# EAGLE board schematic (EAGLE 8.7.1), part 1 of 2
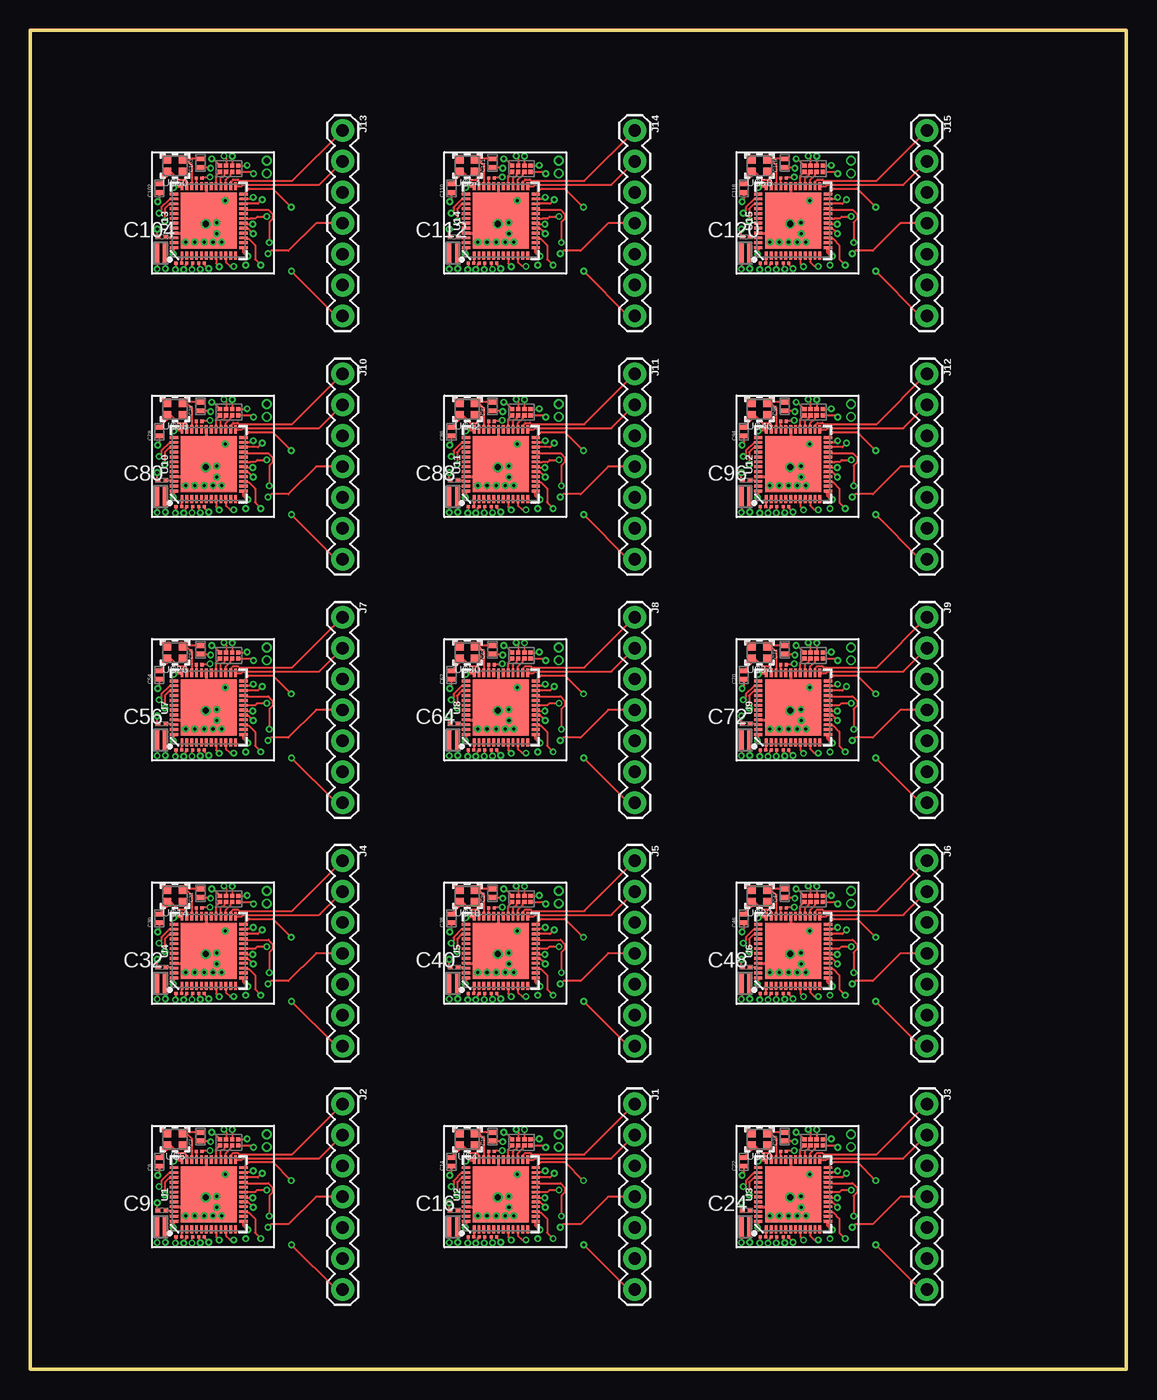
[diagram p0: board, top side]
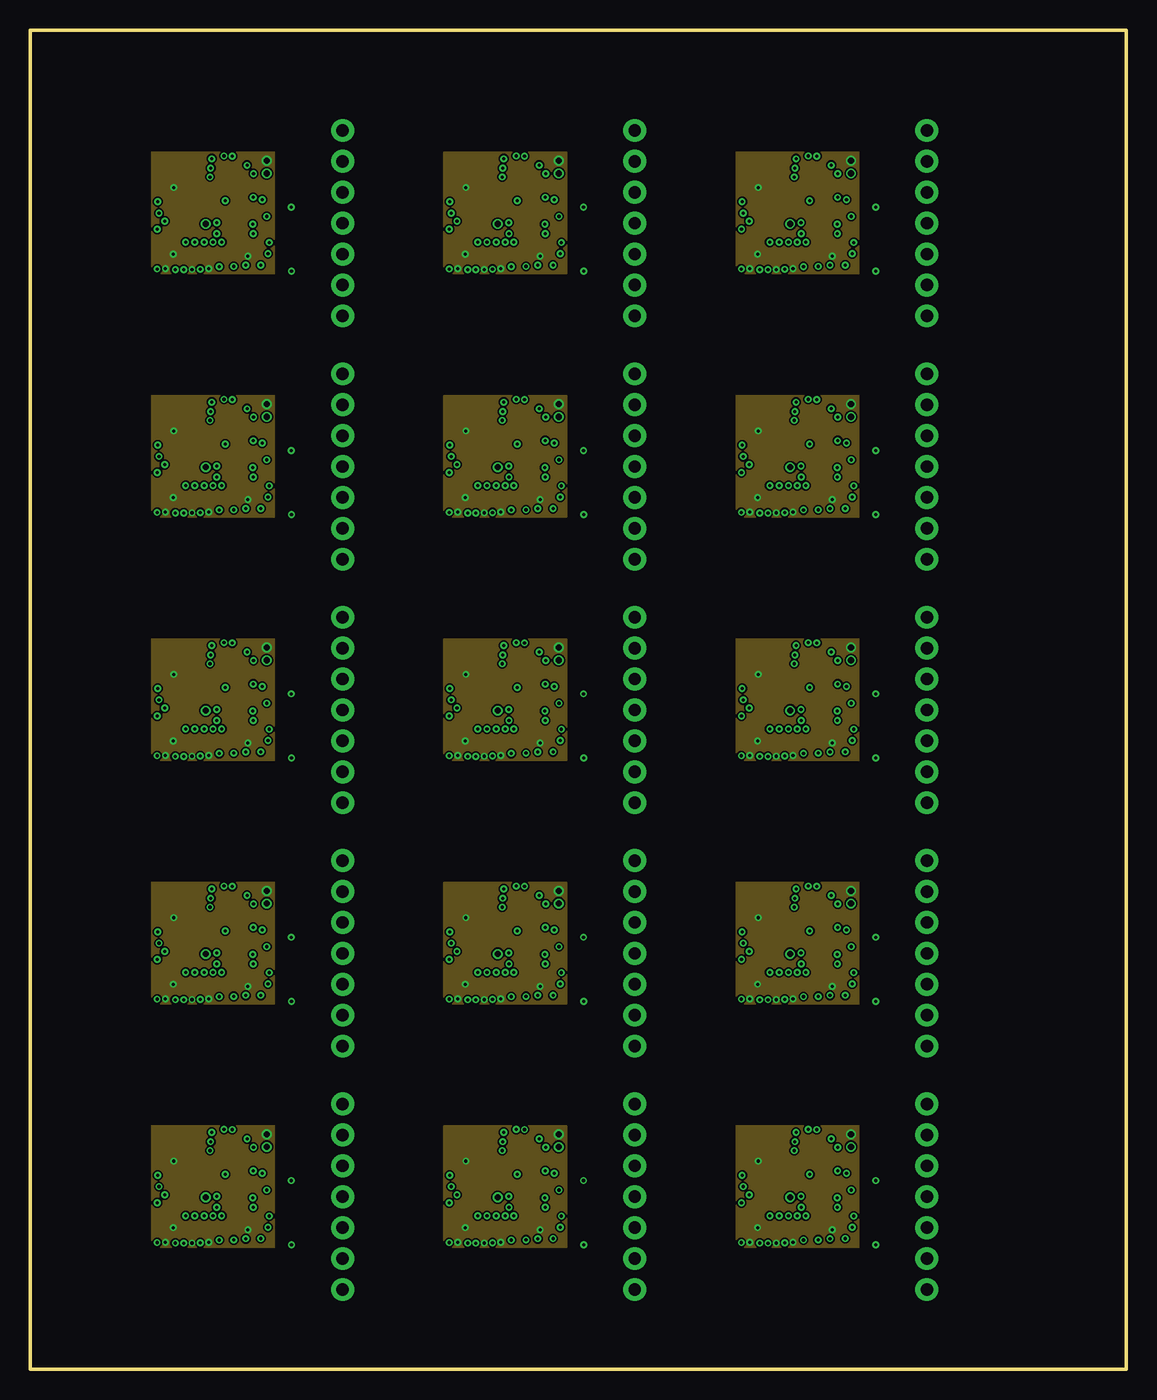
[diagram p1: board, inner layer Route8]
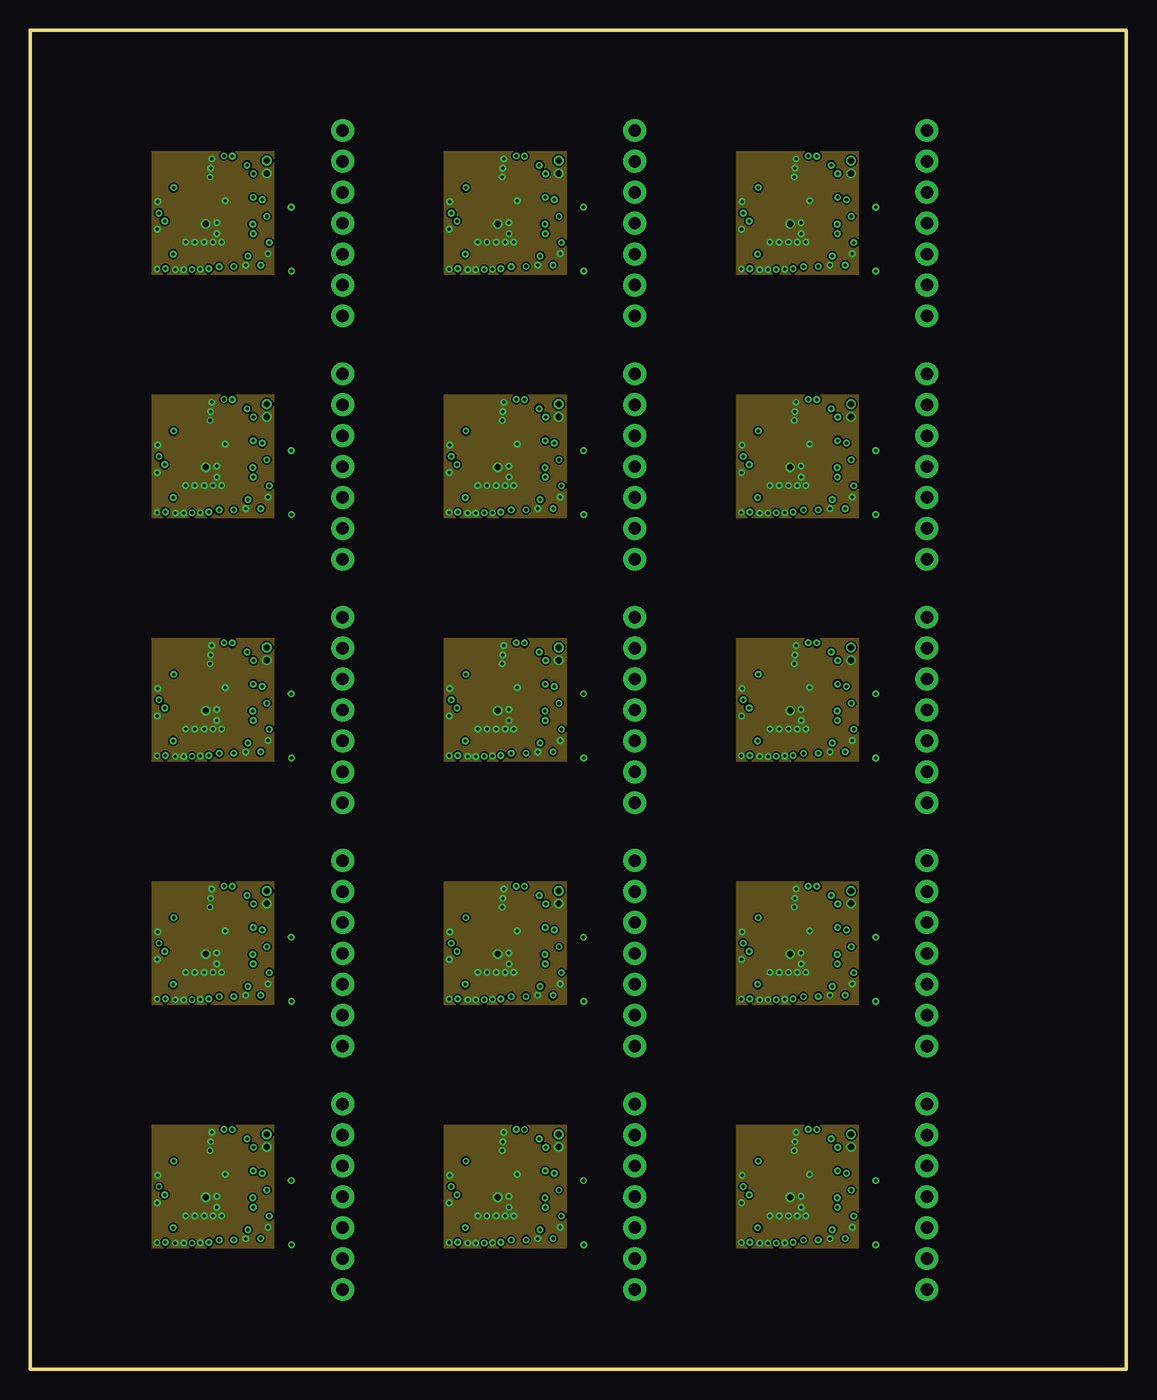
[diagram p2: board, inner layer Route10]
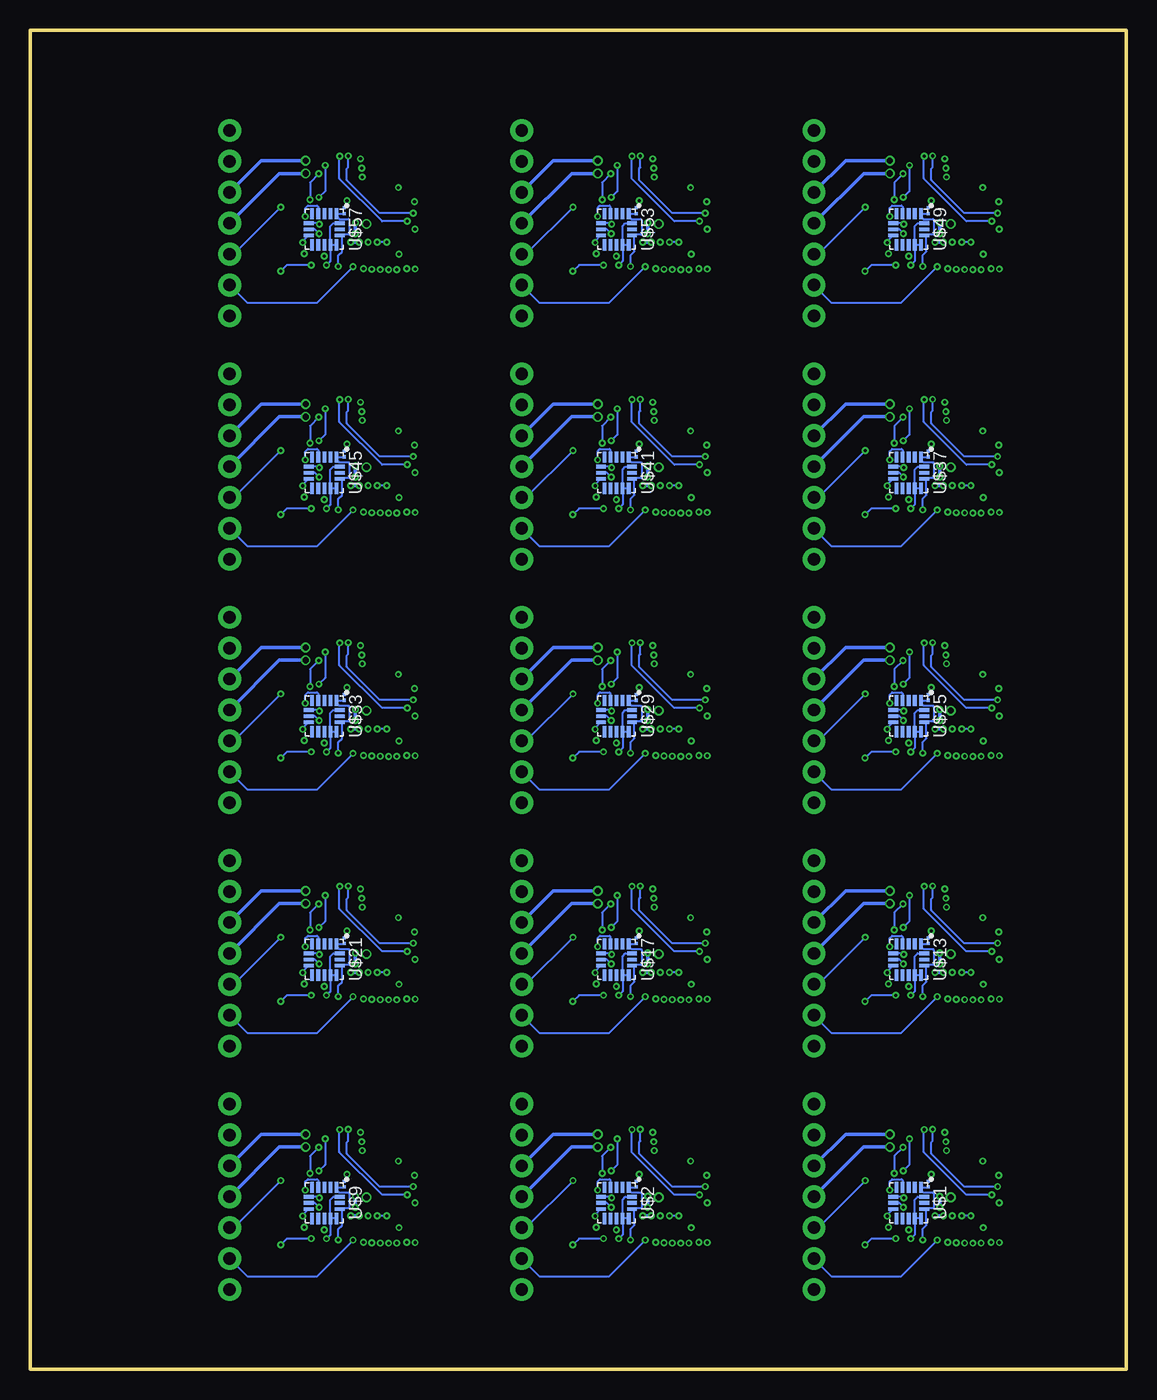
[diagram p3: board, bottom side, seen from below]

Size 90 x 110 mm. Coordinates in mm from the lower left corner, seen from the top.
Outline: 0,110 0,0 90,0 90,110 0,110
Copper layers (1*8*10*16): Top 0.035mm / dielectric 0.42mm / Route8 0.035mm / dielectric 0.62mm / Route10 0.035mm / dielectric 0.42mm / Bottom 0.035mm
Design rules "default *": minimum track width 6mil, minimum drill 10mil, track to track 5mil, track to pad 5mil, pad to pad 5mil, via to via 5mil, smd to smd 2mil, copper to edge 40mil, drill to drill 6mil, minimum pad ring 10mil, minimum via ring 6mil, stop-mask expansion 4mil, vias tented up to drill 0mil, thermal gap 10mil

## Footprints (pad centres in the part's own frame; a part is rotated, then mirrored left to right if it is on the bottom)
CAP_0402-L = smd 0.25 x 0.25: 1 -0.229,0; 2 0.229,0
CAPC1005X55N = smd 0.4 x 0.6: 1 -0.4,0; 2 0.3,0
4P7UFCAPACITOR = smd 0.35 x 1.6: 1 -0.4,0.1; 2 0.25,0.1
1X07 = drill 1.016 pad 1.88: 1 0,0; 2 2.54,0; 3 5.08,0; 4 7.62,0; 5 10.16,0; 6 12.7,0; 7 15.24,0
QFN48-6X6MM = smd 0.68 x 0.23: 1 -2.86,2.2; 2 -2.86,1.8; 3 -2.86,1.4; 4 -2.86,1; 5 -2.86,0.6; 6 -2.86,0.2; 7 -2.86,-0.2; 8 -2.86,-0.6; 9 -2.86,-1; 10 -2.86,-1.4; 11 -2.86,-1.8; 12 -2.86,-2.2; 25 2.86,-2.2; 26 2.86,-1.8; 27 2.86,-1.4; 28 2.86,-1; 29 2.86,-0.6; 30 2.86,-0.2; 31 2.86,0.2; 32 2.86,0.6; 33 2.86,1; 34 2.86,1.4; 35 2.86,1.8; 36 2.86,2.2 | smd 0.23 x 0.68: 13 -2.2,-2.86; 14 -1.8,-2.86; 15 -1.4,-2.86; 16 -1,-2.86; 17 -0.6,-2.86; 18 -0.2,-2.86; 19 0.2,-2.86; 20 0.6,-2.86; 21 1,-2.86; 22 1.4,-2.86; 23 1.8,-2.86; 24 2.2,-2.86; 37 2.2,2.86; 38 1.8,2.86; 39 1.4,2.86; 40 1,2.86; 41 0.6,2.86; 42 0.2,2.86; 43 -0.2,2.86; 44 -0.6,2.86; 45 -1,2.86; 46 -1.4,2.86; 47 -1.8,2.86; 48 -2.2,2.86 | smd 4.6 x 4.6: EP 0,0
TFLGA-16/3.3MMX3.1MM = smd 0.3 x 0.8: CS 0.5,-1.275; GND@3 -0.5,1.275; MISO 0,-1.275; MOSI -0.5,-1.275; NC@2 0,1.275; VS 0.5,1.275 | smd 0.925 x 0.3: GND@1 1.288,0.5; GND@2 1.288,1; INT1 1.288,0; INT2 1.288,-1; NC@1 -1.288,0.5; RESERVED@1 -1.288,0; RESERVED@2 -1.288,-1; RESERVED@3 1.288,-0.5; SCLK -1.288,-0.5; VDD/IO -1.288,1
AT25SF161-UUD-T = smd 0.35 x 0.35: 1 1.2,0.9; 2 1.2,0.4; 3 1.2,-0.1; 4 1.2,-0.6; 5 0.7,0.9; 6 0.7,0.4; 7 0.7,-0.1; 8 0.7,-0.6
32MHZCRYSTAL = smd 0.75 x 0.7: 1 0.485,0.47; 2 1.835,0.47; 3 1.835,1.47; 4 0.485,1.47
1UFCAPACITOR = smd 0.35 x 0.4: P$3 0.18,0.15; P$4 0.8,0.15

## Placement (x,y rotation side)
C1  C0402X5R0G104M020BCCAP_0402-L  [CAP_0402-L]  16.24,15.19 270 bottom
C2  C0402X5R0G104M020BCCAP_0402-L  [CAP_0402-L]  12.19,10.88 180 top
C3  C0402X5R0G104M020BCCAP_0402-L  [CAP_0402-L]  14.07,10.87 0 top
C4  C0402X5R0G104M020BCCAP_0402-L  [CAP_0402-L]  13.09,10.87 0 top
C5  C0402C0G1C101J020BCCAP_0402-L  [CAP_0402-L]  13.86,17.88 0 top
C6  GRM1555C1H6R0CA01D  [CAPC1005X55N]  10.59,17.08 90 top
C7  GRM1555C1H6R0CA01D  [CAPC1005X55N]  13.96,19.14 90 top
C8  C0402X5R0G104M020BCCAP_0402-L  [CAP_0402-L]  40.24,15.19 270 bottom
C9  4P7UFCAPACITOR4P7UFCAPACITOR  [4P7UFCAPACITOR]  10.81,11.59 0 top
C10  C0402X5R0G104M020BCCAP_0402-L  [CAP_0402-L]  36.19,10.88 180 top
C11  C0402X5R0G104M020BCCAP_0402-L  [CAP_0402-L]  38.07,10.87 0 top
C12  C0402X5R0G104M020BCCAP_0402-L  [CAP_0402-L]  37.09,10.87 0 top
C13  C0402C0G1C101J020BCCAP_0402-L  [CAP_0402-L]  37.86,17.88 0 top
C14  GRM1555C1H6R0CA01D  [CAPC1005X55N]  34.59,17.08 90 top
C15  GRM1555C1H6R0CA01D  [CAPC1005X55N]  37.96,19.14 90 top
C16  4P7UFCAPACITOR4P7UFCAPACITOR  [4P7UFCAPACITOR]  34.81,11.59 0 top
C17  C0402X5R0G104M020BCCAP_0402-L  [CAP_0402-L]  64.24,15.19 270 bottom
C18  C0402X5R0G104M020BCCAP_0402-L  [CAP_0402-L]  60.19,10.88 180 top
C19  C0402X5R0G104M020BCCAP_0402-L  [CAP_0402-L]  62.07,10.87 0 top
C20  C0402X5R0G104M020BCCAP_0402-L  [CAP_0402-L]  61.09,10.87 0 top
C21  C0402C0G1C101J020BCCAP_0402-L  [CAP_0402-L]  61.86,17.88 0 top
C22  GRM1555C1H6R0CA01D  [CAPC1005X55N]  58.59,17.08 90 top
C23  GRM1555C1H6R0CA01D  [CAPC1005X55N]  61.96,19.14 90 top
C24  4P7UFCAPACITOR4P7UFCAPACITOR  [4P7UFCAPACITOR]  58.81,11.59 0 top
C25  C0402X5R0G104M020BCCAP_0402-L  [CAP_0402-L]  16.24,35.19 270 bottom
C26  C0402X5R0G104M020BCCAP_0402-L  [CAP_0402-L]  12.19,30.88 180 top
C27  C0402X5R0G104M020BCCAP_0402-L  [CAP_0402-L]  14.07,30.87 0 top
C28  C0402X5R0G104M020BCCAP_0402-L  [CAP_0402-L]  13.09,30.87 0 top
C29  C0402C0G1C101J020BCCAP_0402-L  [CAP_0402-L]  13.86,37.88 0 top
C30  GRM1555C1H6R0CA01D  [CAPC1005X55N]  10.59,37.08 90 top
C31  GRM1555C1H6R0CA01D  [CAPC1005X55N]  13.96,39.14 90 top
C32  4P7UFCAPACITOR4P7UFCAPACITOR  [4P7UFCAPACITOR]  10.81,31.59 0 top
C33  C0402X5R0G104M020BCCAP_0402-L  [CAP_0402-L]  40.24,35.19 270 bottom
C34  C0402X5R0G104M020BCCAP_0402-L  [CAP_0402-L]  36.19,30.88 180 top
C35  C0402X5R0G104M020BCCAP_0402-L  [CAP_0402-L]  38.07,30.87 0 top
C36  C0402X5R0G104M020BCCAP_0402-L  [CAP_0402-L]  37.09,30.87 0 top
C37  C0402C0G1C101J020BCCAP_0402-L  [CAP_0402-L]  37.86,37.88 0 top
C38  GRM1555C1H6R0CA01D  [CAPC1005X55N]  34.59,37.08 90 top
C39  GRM1555C1H6R0CA01D  [CAPC1005X55N]  37.96,39.14 90 top
C40  4P7UFCAPACITOR4P7UFCAPACITOR  [4P7UFCAPACITOR]  34.81,31.59 0 top
C41  C0402X5R0G104M020BCCAP_0402-L  [CAP_0402-L]  64.24,35.19 270 bottom
C42  C0402X5R0G104M020BCCAP_0402-L  [CAP_0402-L]  60.19,30.88 180 top
C43  C0402X5R0G104M020BCCAP_0402-L  [CAP_0402-L]  62.07,30.87 0 top
C44  C0402X5R0G104M020BCCAP_0402-L  [CAP_0402-L]  61.09,30.87 0 top
C45  C0402C0G1C101J020BCCAP_0402-L  [CAP_0402-L]  61.86,37.88 0 top
C46  GRM1555C1H6R0CA01D  [CAPC1005X55N]  58.59,37.08 90 top
C47  GRM1555C1H6R0CA01D  [CAPC1005X55N]  61.96,39.14 90 top
C48  4P7UFCAPACITOR4P7UFCAPACITOR  [4P7UFCAPACITOR]  58.81,31.59 0 top
C49  C0402X5R0G104M020BCCAP_0402-L  [CAP_0402-L]  16.24,55.19 270 bottom
C50  C0402X5R0G104M020BCCAP_0402-L  [CAP_0402-L]  12.19,50.88 180 top
C51  C0402X5R0G104M020BCCAP_0402-L  [CAP_0402-L]  14.07,50.87 0 top
C52  C0402X5R0G104M020BCCAP_0402-L  [CAP_0402-L]  13.09,50.87 0 top
C53  C0402C0G1C101J020BCCAP_0402-L  [CAP_0402-L]  13.86,57.88 0 top
C54  GRM1555C1H6R0CA01D  [CAPC1005X55N]  10.59,57.08 90 top
C55  GRM1555C1H6R0CA01D  [CAPC1005X55N]  13.96,59.14 90 top
C56  4P7UFCAPACITOR4P7UFCAPACITOR  [4P7UFCAPACITOR]  10.81,51.59 0 top
C57  C0402X5R0G104M020BCCAP_0402-L  [CAP_0402-L]  40.24,55.19 270 bottom
C58  C0402X5R0G104M020BCCAP_0402-L  [CAP_0402-L]  36.19,50.88 180 top
C59  C0402X5R0G104M020BCCAP_0402-L  [CAP_0402-L]  38.07,50.87 0 top
C60  C0402X5R0G104M020BCCAP_0402-L  [CAP_0402-L]  37.09,50.87 0 top
C61  C0402C0G1C101J020BCCAP_0402-L  [CAP_0402-L]  37.86,57.88 0 top
C62  GRM1555C1H6R0CA01D  [CAPC1005X55N]  34.59,57.08 90 top
C63  GRM1555C1H6R0CA01D  [CAPC1005X55N]  37.96,59.14 90 top
C64  4P7UFCAPACITOR4P7UFCAPACITOR  [4P7UFCAPACITOR]  34.81,51.59 0 top
C65  C0402X5R0G104M020BCCAP_0402-L  [CAP_0402-L]  64.24,55.19 270 bottom
C66  C0402X5R0G104M020BCCAP_0402-L  [CAP_0402-L]  60.19,50.88 180 top
C67  C0402X5R0G104M020BCCAP_0402-L  [CAP_0402-L]  62.07,50.87 0 top
C68  C0402X5R0G104M020BCCAP_0402-L  [CAP_0402-L]  61.09,50.87 0 top
C69  C0402C0G1C101J020BCCAP_0402-L  [CAP_0402-L]  61.86,57.88 0 top
C70  GRM1555C1H6R0CA01D  [CAPC1005X55N]  58.59,57.08 90 top
C71  GRM1555C1H6R0CA01D  [CAPC1005X55N]  61.96,59.14 90 top
C72  4P7UFCAPACITOR4P7UFCAPACITOR  [4P7UFCAPACITOR]  58.81,51.59 0 top
C73  C0402X5R0G104M020BCCAP_0402-L  [CAP_0402-L]  16.24,75.19 270 bottom
C74  C0402X5R0G104M020BCCAP_0402-L  [CAP_0402-L]  12.19,70.88 180 top
C75  C0402X5R0G104M020BCCAP_0402-L  [CAP_0402-L]  14.07,70.87 0 top
C76  C0402X5R0G104M020BCCAP_0402-L  [CAP_0402-L]  13.09,70.87 0 top
C77  C0402C0G1C101J020BCCAP_0402-L  [CAP_0402-L]  13.86,77.88 0 top
C78  GRM1555C1H6R0CA01D  [CAPC1005X55N]  10.59,77.08 90 top
C79  GRM1555C1H6R0CA01D  [CAPC1005X55N]  13.96,79.14 90 top
C80  4P7UFCAPACITOR4P7UFCAPACITOR  [4P7UFCAPACITOR]  10.81,71.59 0 top
C81  C0402X5R0G104M020BCCAP_0402-L  [CAP_0402-L]  40.24,75.19 270 bottom
C82  C0402X5R0G104M020BCCAP_0402-L  [CAP_0402-L]  36.19,70.88 180 top
C83  C0402X5R0G104M020BCCAP_0402-L  [CAP_0402-L]  38.07,70.87 0 top
C84  C0402X5R0G104M020BCCAP_0402-L  [CAP_0402-L]  37.09,70.87 0 top
C85  C0402C0G1C101J020BCCAP_0402-L  [CAP_0402-L]  37.86,77.88 0 top
C86  GRM1555C1H6R0CA01D  [CAPC1005X55N]  34.59,77.08 90 top
C87  GRM1555C1H6R0CA01D  [CAPC1005X55N]  37.96,79.14 90 top
C88  4P7UFCAPACITOR4P7UFCAPACITOR  [4P7UFCAPACITOR]  34.81,71.59 0 top
C89  C0402X5R0G104M020BCCAP_0402-L  [CAP_0402-L]  64.24,75.19 270 bottom
C90  C0402X5R0G104M020BCCAP_0402-L  [CAP_0402-L]  60.19,70.88 180 top
C91  C0402X5R0G104M020BCCAP_0402-L  [CAP_0402-L]  62.07,70.87 0 top
C92  C0402X5R0G104M020BCCAP_0402-L  [CAP_0402-L]  61.09,70.87 0 top
C93  C0402C0G1C101J020BCCAP_0402-L  [CAP_0402-L]  61.86,77.88 0 top
C94  GRM1555C1H6R0CA01D  [CAPC1005X55N]  58.59,77.08 90 top
C95  GRM1555C1H6R0CA01D  [CAPC1005X55N]  61.96,79.14 90 top
C96  4P7UFCAPACITOR4P7UFCAPACITOR  [4P7UFCAPACITOR]  58.81,71.59 0 top
C97  C0402X5R0G104M020BCCAP_0402-L  [CAP_0402-L]  16.24,95.19 270 bottom
C98  C0402X5R0G104M020BCCAP_0402-L  [CAP_0402-L]  12.19,90.88 180 top
C99  C0402X5R0G104M020BCCAP_0402-L  [CAP_0402-L]  14.07,90.87 0 top
C100  C0402X5R0G104M020BCCAP_0402-L  [CAP_0402-L]  13.09,90.87 0 top
C101  C0402C0G1C101J020BCCAP_0402-L  [CAP_0402-L]  13.86,97.88 0 top
C102  GRM1555C1H6R0CA01D  [CAPC1005X55N]  10.59,97.08 90 top
C103  GRM1555C1H6R0CA01D  [CAPC1005X55N]  13.96,99.14 90 top
C104  4P7UFCAPACITOR4P7UFCAPACITOR  [4P7UFCAPACITOR]  10.81,91.59 0 top
C105  C0402X5R0G104M020BCCAP_0402-L  [CAP_0402-L]  40.24,95.19 270 bottom
C106  C0402X5R0G104M020BCCAP_0402-L  [CAP_0402-L]  36.19,90.88 180 top
C107  C0402X5R0G104M020BCCAP_0402-L  [CAP_0402-L]  38.07,90.87 0 top
C108  C0402X5R0G104M020BCCAP_0402-L  [CAP_0402-L]  37.09,90.87 0 top
C109  C0402C0G1C101J020BCCAP_0402-L  [CAP_0402-L]  37.86,97.88 0 top
C110  GRM1555C1H6R0CA01D  [CAPC1005X55N]  34.59,97.08 90 top
C111  GRM1555C1H6R0CA01D  [CAPC1005X55N]  37.96,99.14 90 top
C112  4P7UFCAPACITOR4P7UFCAPACITOR  [4P7UFCAPACITOR]  34.81,91.59 0 top
C113  C0402X5R0G104M020BCCAP_0402-L  [CAP_0402-L]  64.24,95.19 270 bottom
C114  C0402X5R0G104M020BCCAP_0402-L  [CAP_0402-L]  60.19,90.88 180 top
C115  C0402X5R0G104M020BCCAP_0402-L  [CAP_0402-L]  62.07,90.87 0 top
C116  C0402X5R0G104M020BCCAP_0402-L  [CAP_0402-L]  61.09,90.87 0 top
C117  C0402C0G1C101J020BCCAP_0402-L  [CAP_0402-L]  61.86,97.88 0 top
C118  GRM1555C1H6R0CA01D  [CAPC1005X55N]  58.59,97.08 90 top
C119  GRM1555C1H6R0CA01D  [CAPC1005X55N]  61.96,99.14 90 top
C120  4P7UFCAPACITOR4P7UFCAPACITOR  [4P7UFCAPACITOR]  58.81,91.59 0 top
J1  header  [1X07]  49.64,21.78 270 top
J2  header  [1X07]  25.64,21.78 270 top
J3  header  [1X07]  73.64,21.78 270 top
J4  header  [1X07]  25.64,41.78 270 top
J5  header  [1X07]  49.64,41.78 270 top
J6  header  [1X07]  73.64,41.78 270 top
J7  header  [1X07]  25.64,61.78 270 top
J8  header  [1X07]  49.64,61.78 270 top
J9  header  [1X07]  73.64,61.78 270 top
J10  header  [1X07]  25.64,81.78 270 top
J11  header  [1X07]  49.64,81.78 270 top
J12  header  [1X07]  73.64,81.78 270 top
J13  header  [1X07]  25.64,101.78 270 top
J14  header  [1X07]  49.64,101.78 270 top
J15  header  [1X07]  73.64,101.78 270 top
U1  NRF52832  [QFN48-6X6MM]  14.65,14.35 90 top
U2  NRF52832  [QFN48-6X6MM]  38.65,14.35 90 top
U3  NRF52832  [QFN48-6X6MM]  62.65,14.35 90 top
U4  NRF52832  [QFN48-6X6MM]  14.65,34.35 90 top
U5  NRF52832  [QFN48-6X6MM]  38.65,34.35 90 top
U6  NRF52832  [QFN48-6X6MM]  62.65,34.35 90 top
U7  NRF52832  [QFN48-6X6MM]  14.65,54.35 90 top
U8  NRF52832  [QFN48-6X6MM]  38.65,54.35 90 top
U9  NRF52832  [QFN48-6X6MM]  62.65,54.35 90 top
U10  NRF52832  [QFN48-6X6MM]  14.65,74.35 90 top
U11  NRF52832  [QFN48-6X6MM]  38.65,74.35 90 top
U12  NRF52832  [QFN48-6X6MM]  62.65,74.35 90 top
U13  NRF52832  [QFN48-6X6MM]  14.65,94.35 90 top
U14  NRF52832  [QFN48-6X6MM]  38.65,94.35 90 top
U15  NRF52832  [QFN48-6X6MM]  62.65,94.35 90 top
U$1  ADXL362  [TFLGA-16/3.3MMX3.1MM]  17.86,13.66 270 bottom
U$2  ADXL362  [TFLGA-16/3.3MMX3.1MM]  41.86,13.66 270 bottom
U$3  AT25SF161-UUD-T  [AT25SF161-UUD-T]  16.17,19.58 270 top
U$4  32MHZCRYSTAL  [32MHZCRYSTAL]  37.05,19.85 180 top
U$5  1UFCAPACITOR  [1UFCAPACITOR]  34.31,12.88 0 top
U$6  32MHZCRYSTAL  [32MHZCRYSTAL]  13.05,19.85 180 top
U$7  1UFCAPACITOR  [1UFCAPACITOR]  10.31,12.88 0 top
U$8  AT25SF161-UUD-T  [AT25SF161-UUD-T]  40.17,19.58 270 top
U$9  ADXL362  [TFLGA-16/3.3MMX3.1MM]  65.86,13.66 270 bottom
U$10  32MHZCRYSTAL  [32MHZCRYSTAL]  61.05,19.85 180 top
U$11  1UFCAPACITOR  [1UFCAPACITOR]  58.31,12.88 0 top
U$12  AT25SF161-UUD-T  [AT25SF161-UUD-T]  64.17,19.58 270 top
U$13  ADXL362  [TFLGA-16/3.3MMX3.1MM]  17.86,33.66 270 bottom
U$14  32MHZCRYSTAL  [32MHZCRYSTAL]  13.05,39.85 180 top
U$15  1UFCAPACITOR  [1UFCAPACITOR]  10.31,32.88 0 top
U$16  AT25SF161-UUD-T  [AT25SF161-UUD-T]  16.17,39.58 270 top
U$17  ADXL362  [TFLGA-16/3.3MMX3.1MM]  41.86,33.66 270 bottom
U$18  32MHZCRYSTAL  [32MHZCRYSTAL]  37.05,39.85 180 top
U$19  1UFCAPACITOR  [1UFCAPACITOR]  34.31,32.88 0 top
U$20  AT25SF161-UUD-T  [AT25SF161-UUD-T]  40.17,39.58 270 top
U$21  ADXL362  [TFLGA-16/3.3MMX3.1MM]  65.86,33.66 270 bottom
U$22  32MHZCRYSTAL  [32MHZCRYSTAL]  61.05,39.85 180 top
U$23  1UFCAPACITOR  [1UFCAPACITOR]  58.31,32.88 0 top
U$24  AT25SF161-UUD-T  [AT25SF161-UUD-T]  64.17,39.58 270 top
U$25  ADXL362  [TFLGA-16/3.3MMX3.1MM]  17.86,53.66 270 bottom
U$26  32MHZCRYSTAL  [32MHZCRYSTAL]  13.05,59.85 180 top
U$27  1UFCAPACITOR  [1UFCAPACITOR]  10.31,52.88 0 top
U$28  AT25SF161-UUD-T  [AT25SF161-UUD-T]  16.17,59.58 270 top
U$29  ADXL362  [TFLGA-16/3.3MMX3.1MM]  41.86,53.66 270 bottom
U$30  32MHZCRYSTAL  [32MHZCRYSTAL]  37.05,59.85 180 top
U$31  1UFCAPACITOR  [1UFCAPACITOR]  34.31,52.88 0 top
U$32  AT25SF161-UUD-T  [AT25SF161-UUD-T]  40.17,59.58 270 top
U$33  ADXL362  [TFLGA-16/3.3MMX3.1MM]  65.86,53.66 270 bottom
U$34  32MHZCRYSTAL  [32MHZCRYSTAL]  61.05,59.85 180 top
U$35  1UFCAPACITOR  [1UFCAPACITOR]  58.31,52.88 0 top
U$36  AT25SF161-UUD-T  [AT25SF161-UUD-T]  64.17,59.58 270 top
U$37  ADXL362  [TFLGA-16/3.3MMX3.1MM]  17.86,73.66 270 bottom
U$38  32MHZCRYSTAL  [32MHZCRYSTAL]  13.05,79.85 180 top
U$39  1UFCAPACITOR  [1UFCAPACITOR]  10.31,72.88 0 top
U$40  AT25SF161-UUD-T  [AT25SF161-UUD-T]  16.17,79.58 270 top
U$41  ADXL362  [TFLGA-16/3.3MMX3.1MM]  41.86,73.66 270 bottom
U$42  32MHZCRYSTAL  [32MHZCRYSTAL]  37.05,79.85 180 top
U$43  1UFCAPACITOR  [1UFCAPACITOR]  34.31,72.88 0 top
U$44  AT25SF161-UUD-T  [AT25SF161-UUD-T]  40.17,79.58 270 top
U$45  ADXL362  [TFLGA-16/3.3MMX3.1MM]  65.86,73.66 270 bottom
U$46  32MHZCRYSTAL  [32MHZCRYSTAL]  61.05,79.85 180 top
U$47  1UFCAPACITOR  [1UFCAPACITOR]  58.31,72.88 0 top
U$48  AT25SF161-UUD-T  [AT25SF161-UUD-T]  64.17,79.58 270 top
U$49  ADXL362  [TFLGA-16/3.3MMX3.1MM]  17.86,93.66 270 bottom
U$50  32MHZCRYSTAL  [32MHZCRYSTAL]  13.05,99.85 180 top
U$51  1UFCAPACITOR  [1UFCAPACITOR]  10.31,92.88 0 top
U$52  AT25SF161-UUD-T  [AT25SF161-UUD-T]  16.17,99.58 270 top
U$53  ADXL362  [TFLGA-16/3.3MMX3.1MM]  41.86,93.66 270 bottom
U$54  32MHZCRYSTAL  [32MHZCRYSTAL]  37.05,99.85 180 top
U$55  1UFCAPACITOR  [1UFCAPACITOR]  34.31,92.88 0 top
U$56  AT25SF161-UUD-T  [AT25SF161-UUD-T]  40.17,99.58 270 top
U$57  ADXL362  [TFLGA-16/3.3MMX3.1MM]  65.86,93.66 270 bottom
U$58  32MHZCRYSTAL  [32MHZCRYSTAL]  61.05,99.85 180 top
U$59  1UFCAPACITOR  [1UFCAPACITOR]  58.31,92.88 0 top
U$60  AT25SF161-UUD-T  [AT25SF161-UUD-T]  64.17,99.58 270 top

## Library data of the parts
C1-C4 C8 C10-C12 C17-C20 C25-C28 C33-C36 C41-C44 C49-C52 C57-C60 C65-C68 C73-C76 C81-C84 C89-C92 C97-C100 C105-C108 C113-C116 = 0p1_uF_capacitor; MANUFACTURER_PART_NUMBER: C0402C0G1C101J020BC; VENDOR: TDK
C5 C13 C21 C29 C37 C45 C53 C61 C69 C77 C85 C93 C101 C109 C117 = 100_pF_capacitor; MANUFACTURER_PART_NUMBER: C0402C0G1C101J020BC; VENDOR: TDK
C6 C7 C14 C15 C22 C23 C30 C31 C38 C39 C46 C47 C54 C55 C62 C63 C70 C71 C78 C79 C86 C87 C94 C95 C102 C103 C110 C111 C118 C119 = 6pf_capacitor_new-bigger; DESCRIPTION: 0402 6 pF 50 V ±0.25 pF Tolerance C0G SMT Multilayer Ceramic Capacitor; DIGI-KEY_PART_NUMBER: 490-8222-1-ND; DIGI-KEY_PURCHASE_URL: https://www.digikey.com/product-detail/en/murata-electronics-north-america/GRM1555C1H6R0CA01D/490-8222-1-ND/4380516?WT.z_cid=ref_snapeda&utm_source=snapeda&utm_medium=aggregator&utm_campaign=buynow; MF: Murata; MP: GRM1555C1H6R0CA01D; PACKAGE: 0402 Murata
C9 C16 C24 C32 C40 C48 C56 C64 C72 C80 C88 C96 C104 C112 C120 = 4p7_uF_capacitor; MANUFACTURER_PART_NUMBER: C0816X5R0J475M050AC; VENDOR: TDK
J1-J15 = SparkFun-Connectors
U1-U15 = nrf52832-breakout-temp; PROD_ID: IC-13460
U$1 U$2 U$9 U$13 U$17 U$21 U$25 U$29 U$33 U$37 U$41 U$45 U$49 U$53 U$57 = ADXL362
U$3 U$8 U$12 U$16 U$20 U$24 U$28 U$32 U$36 U$40 U$44 U$48 U$52 U$56 U$60 = AT25SF161-UUD-T
U$4 U$6 U$10 U$14 U$18 U$22 U$26 U$30 U$34 U$38 U$42 U$46 U$50 U$54 U$58 = 32_mhz_crystal
U$5 U$7 U$11 U$15 U$19 U$23 U$27 U$31 U$35 U$39 U$43 U$47 U$51 U$55 U$59 = 1_uF_capacitor

## Nets
ADXL_POWER-QFAA: C1.2 U1.10 U$1.VDD/IO U$1.VS
ADXL_POWER-QFAA1: C8.2 U2.10 U$2.VDD/IO U$2.VS
ADXL_POWER-QFAA2: C17.2 U3.10 U$9.VDD/IO U$9.VS
ADXL_POWER-QFAA3: C25.2 U4.10 U$13.VDD/IO U$13.VS
ADXL_POWER-QFAA4: C33.2 U5.10 U$17.VDD/IO U$17.VS
ADXL_POWER-QFAA5: C41.2 U6.10 U$21.VDD/IO U$21.VS
ADXL_POWER-QFAA6: C49.2 U7.10 U$25.VDD/IO U$25.VS
ADXL_POWER-QFAA7: C57.2 U8.10 U$29.VDD/IO U$29.VS
ADXL_POWER-QFAA8: C65.2 U9.10 U$33.VDD/IO U$33.VS
ADXL_POWER-QFAA9: C73.2 U10.10 U$37.VDD/IO U$37.VS
ADXL_POWER-QFAA10: C81.2 U11.10 U$41.VDD/IO U$41.VS
ADXL_POWER-QFAA11: C89.2 U12.10 U$45.VDD/IO U$45.VS
ADXL_POWER-QFAA12: C97.2 U13.10 U$49.VDD/IO U$49.VS
ADXL_POWER-QFAA13: C105.2 U14.10 U$53.VDD/IO U$53.VS
ADXL_POWER-QFAA14: C113.2 U15.10 U$57.VDD/IO U$57.VS
ANT-QFAA: U1.30
ANT-QFAA1: U2.30
ANT-QFAA2: U3.30
ANT-QFAA3: U4.30
ANT-QFAA4: U5.30
ANT-QFAA5: U6.30
ANT-QFAA6: U7.30
ANT-QFAA7: U8.30
ANT-QFAA8: U9.30
ANT-QFAA9: U10.30
ANT-QFAA10: U11.30
ANT-QFAA11: U12.30
ANT-QFAA12: U13.30
ANT-QFAA13: U14.30
ANT-QFAA14: U15.30
CS-QFAA: U1.21 U$1.CS
CS-QFAA1: U2.21 U$2.CS
CS-QFAA2: U3.21 U$9.CS
CS-QFAA3: U4.21 U$13.CS
CS-QFAA4: U5.21 U$17.CS
CS-QFAA5: U6.21 U$21.CS
CS-QFAA6: U7.21 U$25.CS
CS-QFAA7: U8.21 U$29.CS
CS-QFAA8: U9.21 U$33.CS
CS-QFAA9: U10.21 U$37.CS
CS-QFAA10: U11.21 U$41.CS
CS-QFAA11: U12.21 U$45.CS
CS-QFAA12: U13.21 U$49.CS
CS-QFAA13: U14.21 U$53.CS
CS-QFAA14: U15.21 U$57.CS
CS_FLASH: U1.23 U$3.5
CS_FLASH1: U2.23 U$8.5
CS_FLASH2: U3.23 U$12.5
CS_FLASH3: U4.23 U$16.5
CS_FLASH4: U5.23 U$20.5
CS_FLASH5: U6.23 U$24.5
CS_FLASH6: U7.23 U$28.5
CS_FLASH7: U8.23 U$32.5
CS_FLASH8: U9.23 U$36.5
CS_FLASH9: U10.23 U$40.5
CS_FLASH10: U11.23 U$44.5
CS_FLASH11: U12.23 U$48.5
CS_FLASH12: U13.23 U$52.5
CS_FLASH13: U14.23 U$56.5
CS_FLASH14: U15.23 U$60.5
DEC1-QFAA: C2.1 U1.1
DEC1-QFAA1: C10.1 U2.1
DEC1-QFAA2: C18.1 U3.1
DEC1-QFAA3: C26.1 U4.1
DEC1-QFAA4: C34.1 U5.1
DEC1-QFAA5: C42.1 U6.1
DEC1-QFAA6: C50.1 U7.1
DEC1-QFAA7: C58.1 U8.1
DEC1-QFAA8: C66.1 U9.1
DEC1-QFAA9: C74.1 U10.1
DEC1-QFAA10: C82.1 U11.1
DEC1-QFAA11: C90.1 U12.1
DEC1-QFAA12: C98.1 U13.1
DEC1-QFAA13: C106.1 U14.1
DEC1-QFAA14: C114.1 U15.1
DEC3-QFAA: C5.1 U1.33
DEC3-QFAA1: C13.1 U2.33
DEC3-QFAA2: C21.1 U3.33
DEC3-QFAA3: C29.1 U4.33
DEC3-QFAA4: C37.1 U5.33
DEC3-QFAA5: C45.1 U6.33
DEC3-QFAA6: C53.1 U7.33
DEC3-QFAA7: C61.1 U8.33
DEC3-QFAA8: C69.1 U9.33
DEC3-QFAA9: C77.1 U10.33
DEC3-QFAA10: C85.1 U11.33
DEC3-QFAA11: C93.1 U12.33
DEC3-QFAA12: C101.1 U13.33
DEC3-QFAA13: C109.1 U14.33
DEC3-QFAA14: C117.1 U15.33
DEC4-QFAA: U1.46 U$7.P$4
DEC4-QFAA1: U2.46 U$5.P$4
DEC4-QFAA2: U3.46 U$11.P$4
DEC4-QFAA3: U4.46 U$15.P$4
DEC4-QFAA4: U5.46 U$19.P$4
DEC4-QFAA5: U6.46 U$23.P$4
DEC4-QFAA6: U7.46 U$27.P$4
DEC4-QFAA7: U8.46 U$31.P$4
DEC4-QFAA8: U9.46 U$35.P$4
DEC4-QFAA9: U10.46 U$39.P$4
DEC4-QFAA10: U11.46 U$43.P$4
DEC4-QFAA11: U12.46 U$47.P$4
DEC4-QFAA12: U13.46 U$51.P$4
DEC4-QFAA13: U14.46 U$55.P$4
DEC4-QFAA14: U15.46 U$59.P$4
FLASH_POWER: U1.22 U$3.1
FLASH_POWER1: U2.22 U$8.1
FLASH_POWER2: U3.22 U$12.1
FLASH_POWER3: U4.22 U$16.1
FLASH_POWER4: U5.22 U$20.1
FLASH_POWER5: U6.22 U$24.1
FLASH_POWER6: U7.22 U$28.1
FLASH_POWER7: U8.22 U$32.1
FLASH_POWER8: U9.22 U$36.1
FLASH_POWER9: U10.22 U$40.1
FLASH_POWER10: U11.22 U$44.1
FLASH_POWER11: U12.22 U$48.1
FLASH_POWER12: U13.22 U$52.1
FLASH_POWER13: U14.22 U$56.1
FLASH_POWER14: U15.22 U$60.1
GND: C1.1 C2.2 C3.1 C4.1 C5.2 C6.1 C7.1 C9.1 J2.4 U1.31 U1.45 U1.EP U$1.GND@1 U$1.GND@2 U$1.GND@3 U$3.8 U$7.P$3
GND1: C8.1 C10.2 C11.1 C12.1 C13.2 C14.1 C15.1 C16.1 J1.4 U2.31 U2.45 U2.EP U$2.GND@1 U$2.GND@2 U$2.GND@3 U$5.P$3 U$8.8
GND2: C17.1 C18.2 C19.1 C20.1 C21.2 C22.1 C23.1 C24.1 J3.4 U3.31 U3.45 U3.EP U$9.GND@1 U$9.GND@2 U$9.GND@3 U$11.P$3 U$12.8
GND3: C25.1 C26.2 C27.1 C28.1 C29.2 C30.1 C31.1 C32.1 J4.4 U4.31 U4.45 U4.EP U$13.GND@1 U$13.GND@2 U$13.GND@3 U$15.P$3 U$16.8
GND4: C33.1 C34.2 C35.1 C36.1 C37.2 C38.1 C39.1 C40.1 J5.4 U5.31 U5.45 U5.EP U$17.GND@1 U$17.GND@2 U$17.GND@3 U$19.P$3 U$20.8
GND5: C41.1 C42.2 C43.1 C44.1 C45.2 C46.1 C47.1 C48.1 J6.4 U6.31 U6.45 U6.EP U$21.GND@1 U$21.GND@2 U$21.GND@3 U$23.P$3 U$24.8
GND6: C49.1 C50.2 C51.1 C52.1 C53.2 C54.1 C55.1 C56.1 J7.4 U7.31 U7.45 U7.EP U$25.GND@1 U$25.GND@2 U$25.GND@3 U$27.P$3 U$28.8
GND7: C57.1 C58.2 C59.1 C60.1 C61.2 C62.1 C63.1 C64.1 J8.4 U8.31 U8.45 U8.EP U$29.GND@1 U$29.GND@2 U$29.GND@3 U$31.P$3 U$32.8
GND8: C65.1 C66.2 C67.1 C68.1 C69.2 C70.1 C71.1 C72.1 J9.4 U9.31 U9.45 U9.EP U$33.GND@1 U$33.GND@2 U$33.GND@3 U$35.P$3 U$36.8
GND9: C73.1 C74.2 C75.1 C76.1 C77.2 C78.1 C79.1 C80.1 J10.4 U10.31 U10.45 U10.EP U$37.GND@1 U$37.GND@2 U$37.GND@3 U$39.P$3 U$40.8
GND10: C81.1 C82.2 C83.1 C84.1 C85.2 C86.1 C87.1 C88.1 J11.4 U11.31 U11.45 U11.EP U$41.GND@1 U$41.GND@2 U$41.GND@3 U$43.P$3 U$44.8
GND11: C89.1 C90.2 C91.1 C92.1 C93.2 C94.1 C95.1 C96.1 J12.4 U12.31 U12.45 U12.EP U$45.GND@1 U$45.GND@2 U$45.GND@3 U$47.P$3 U$48.8
GND12: C97.1 C98.2 C99.1 C100.1 C101.2 C102.1 C103.1 C104.1 J13.4 U13.31 U13.45 U13.EP U$49.GND@1 U$49.GND@2 U$49.GND@3 U$51.P$3 U$52.8
GND13: C105.1 C106.2 C107.1 C108.1 C109.2 C110.1 C111.1 C112.1 J14.4 U14.31 U14.45 U14.EP U$53.GND@1 U$53.GND@2 U$53.GND@3 U$55.P$3 U$56.8
GND14: C113.1 C114.2 C115.1 C116.1 C117.2 C118.1 C119.1 C120.1 J15.4 U15.31 U15.45 U15.EP U$57.GND@1 U$57.GND@2 U$57.GND@3 U$59.P$3 U$60.8
HOLD_FLASH: U1.27 U$3.2
HOLD_FLASH1: U2.27 U$8.2
HOLD_FLASH2: U3.27 U$12.2
HOLD_FLASH3: U4.27 U$16.2
HOLD_FLASH4: U5.27 U$20.2
HOLD_FLASH5: U6.27 U$24.2
HOLD_FLASH6: U7.27 U$28.2
HOLD_FLASH7: U8.27 U$32.2
HOLD_FLASH8: U9.27 U$36.2
HOLD_FLASH9: U10.27 U$40.2
HOLD_FLASH10: U11.27 U$44.2
HOLD_FLASH11: U12.27 U$48.2
HOLD_FLASH12: U13.27 U$52.2
HOLD_FLASH13: U14.27 U$56.2
HOLD_FLASH14: U15.27 U$60.2
MISO-QFAA: U1.17 U$1.MISO
MISO-QFAA1: U2.17 U$2.MISO
MISO-QFAA2: U3.17 U$9.MISO
MISO-QFAA3: U4.17 U$13.MISO
MISO-QFAA4: U5.17 U$17.MISO
MISO-QFAA5: U6.17 U$21.MISO
MISO-QFAA6: U7.17 U$25.MISO
MISO-QFAA7: U8.17 U$29.MISO
MISO-QFAA8: U9.17 U$33.MISO
MISO-QFAA9: U10.17 U$37.MISO
MISO-QFAA10: U11.17 U$41.MISO
MISO-QFAA11: U12.17 U$45.MISO
MISO-QFAA12: U13.17 U$49.MISO
MISO-QFAA13: U14.17 U$53.MISO
MISO-QFAA14: U15.17 U$57.MISO
MOSI-QFAA: U1.18 U$1.MOSI
MOSI-QFAA1: U2.18 U$2.MOSI
MOSI-QFAA2: U3.18 U$9.MOSI
MOSI-QFAA3: U4.18 U$13.MOSI
MOSI-QFAA4: U5.18 U$17.MOSI
MOSI-QFAA5: U6.18 U$21.MOSI
MOSI-QFAA6: U7.18 U$25.MOSI
MOSI-QFAA7: U8.18 U$29.MOSI
MOSI-QFAA8: U9.18 U$33.MOSI
MOSI-QFAA9: U10.18 U$37.MOSI
MOSI-QFAA10: U11.18 U$41.MOSI
MOSI-QFAA11: U12.18 U$45.MOSI
MOSI-QFAA12: U13.18 U$49.MOSI
MOSI-QFAA13: U14.18 U$53.MOSI
MOSI-QFAA14: U15.18 U$57.MOSI
P0.06-QFAA: J2.6 U1.8
P0.06-QFAA1: J1.6 U2.8
P0.06-QFAA2: J3.6 U3.8
P0.06-QFAA3: J4.6 U4.8
P0.06-QFAA4: J5.6 U5.8
P0.06-QFAA5: J6.6 U6.8
P0.06-QFAA6: J7.6 U7.8
P0.06-QFAA7: J8.6 U8.8
P0.06-QFAA8: J9.6 U9.8
P0.06-QFAA9: J10.6 U10.8
P0.06-QFAA10: J11.6 U11.8
P0.06-QFAA11: J12.6 U12.8
P0.06-QFAA12: J13.6 U13.8
P0.06-QFAA13: J14.6 U14.8
P0.06-QFAA14: J15.6 U15.8
P0.12-QFAA: J2.7 U1.15
P0.12-QFAA1: J1.7 U2.15
P0.12-QFAA2: J3.7 U3.15
P0.12-QFAA3: J4.7 U4.15
P0.12-QFAA4: J5.7 U5.15
P0.12-QFAA5: J6.7 U6.15
P0.12-QFAA6: J7.7 U7.15
P0.12-QFAA7: J8.7 U8.15
P0.12-QFAA8: J9.7 U9.15
P0.12-QFAA9: J10.7 U10.15
P0.12-QFAA10: J11.7 U11.15
P0.12-QFAA11: J12.7 U12.15
P0.12-QFAA12: J13.7 U13.15
P0.12-QFAA13: J14.7 U14.15
P0.12-QFAA14: J15.7 U15.15
RESET-QFAA: J2.5 U1.24
RESET-QFAA1: J1.5 U2.24
RESET-QFAA2: J3.5 U3.24
RESET-QFAA3: J4.5 U4.24
RESET-QFAA4: J5.5 U5.24
RESET-QFAA5: J6.5 U6.24
RESET-QFAA6: J7.5 U7.24
RESET-QFAA7: J8.5 U8.24
RESET-QFAA8: J9.5 U9.24
RESET-QFAA9: J10.5 U10.24
RESET-QFAA10: J11.5 U11.24
RESET-QFAA11: J12.5 U12.24
RESET-QFAA12: J13.5 U13.24
RESET-QFAA13: J14.5 U14.24
RESET-QFAA14: J15.5 U15.24
SCK_FLASH: U1.28 U$3.3
SCK_FLASH1: U2.28 U$8.3
SCK_FLASH2: U3.28 U$12.3
SCK_FLASH3: U4.28 U$16.3
SCK_FLASH4: U5.28 U$20.3
SCK_FLASH5: U6.28 U$24.3
SCK_FLASH6: U7.28 U$28.3
SCK_FLASH7: U8.28 U$32.3
SCK_FLASH8: U9.28 U$36.3
SCK_FLASH9: U10.28 U$40.3
SCK_FLASH10: U11.28 U$44.3
SCK_FLASH11: U12.28 U$48.3
SCK_FLASH12: U13.28 U$52.3
SCK_FLASH13: U14.28 U$56.3
SCK_FLASH14: U15.28 U$60.3
SCLK-QFAA: U1.19 U$1.SCLK
SCLK-QFAA1: U2.19 U$2.SCLK
SCLK-QFAA2: U3.19 U$9.SCLK
SCLK-QFAA3: U4.19 U$13.SCLK
SCLK-QFAA4: U5.19 U$17.SCLK
SCLK-QFAA5: U6.19 U$21.SCLK
SCLK-QFAA6: U7.19 U$25.SCLK
SCLK-QFAA7: U8.19 U$29.SCLK
SCLK-QFAA8: U9.19 U$33.SCLK
SCLK-QFAA9: U10.19 U$37.SCLK
SCLK-QFAA10: U11.19 U$41.SCLK
SCLK-QFAA11: U12.19 U$45.SCLK
SCLK-QFAA12: U13.19 U$49.SCLK
SCLK-QFAA13: U14.19 U$53.SCLK
SCLK-QFAA14: U15.19 U$57.SCLK
SI_FLASH: U1.29 U$3.4
SI_FLASH1: U2.29 U$8.4
SI_FLASH2: U3.29 U$12.4
SI_FLASH3: U4.29 U$16.4
SI_FLASH4: U5.29 U$20.4
SI_FLASH5: U6.29 U$24.4
SI_FLASH6: U7.29 U$28.4
SI_FLASH7: U8.29 U$32.4
SI_FLASH8: U9.29 U$36.4
SI_FLASH9: U10.29 U$40.4
SI_FLASH10: U11.29 U$44.4
SI_FLASH11: U12.29 U$48.4
SI_FLASH12: U13.29 U$52.4
SI_FLASH13: U14.29 U$56.4
SI_FLASH14: U15.29 U$60.4
SO_FLASH: U1.39 U$3.6
SO_FLASH1: U2.39 U$8.6
SO_FLASH2: U3.39 U$12.6
SO_FLASH3: U4.39 U$16.6
SO_FLASH4: U5.39 U$20.6
SO_FLASH5: U6.39 U$24.6
SO_FLASH6: U7.39 U$28.6
SO_FLASH7: U8.39 U$32.6
SO_FLASH8: U9.39 U$36.6
SO_FLASH9: U10.39 U$40.6
SO_FLASH10: U11.39 U$44.6
SO_FLASH11: U12.39 U$48.6
SO_FLASH12: U13.39 U$52.6
SO_FLASH13: U14.39 U$56.6
SO_FLASH14: U15.39 U$60.6
SWDCLK-QFAA: J2.2 U1.25
SWDCLK-QFAA1: J1.2 U2.25
SWDCLK-QFAA2: J3.2 U3.25
SWDCLK-QFAA3: J4.2 U4.25
SWDCLK-QFAA4: J5.2 U5.25
SWDCLK-QFAA5: J6.2 U6.25
SWDCLK-QFAA6: J7.2 U7.25
SWDCLK-QFAA7: J8.2 U8.25
SWDCLK-QFAA8: J9.2 U9.25
SWDCLK-QFAA9: J10.2 U10.25
SWDCLK-QFAA10: J11.2 U11.25
SWDCLK-QFAA11: J12.2 U12.25
SWDCLK-QFAA12: J13.2 U13.25
SWDCLK-QFAA13: J14.2 U14.25
SWDCLK-QFAA14: J15.2 U15.25
SWDIO-QFAA: J2.1 U1.26
SWDIO-QFAA1: J1.1 U2.26
SWDIO-QFAA2: J3.1 U3.26
SWDIO-QFAA3: J4.1 U4.26
SWDIO-QFAA4: J5.1 U5.26
SWDIO-QFAA5: J6.1 U6.26
SWDIO-QFAA6: J7.1 U7.26
SWDIO-QFAA7: J8.1 U8.26
SWDIO-QFAA8: J9.1 U9.26
SWDIO-QFAA9: J10.1 U10.26
SWDIO-QFAA10: J11.1 U11.26
SWDIO-QFAA11: J12.1 U12.26
SWDIO-QFAA12: J13.1 U13.26
SWDIO-QFAA13: J14.1 U14.26
SWDIO-QFAA14: J15.1 U15.26
VDD: C3.2 C4.2 C9.2 J2.3 U1.13 U1.36 U1.48
VDD1: C11.2 C12.2 C16.2 J1.3 U2.13 U2.36 U2.48
VDD2: C19.2 C20.2 C24.2 J3.3 U3.13 U3.36 U3.48
VDD3: C27.2 C28.2 C32.2 J4.3 U4.13 U4.36 U4.48
VDD4: C35.2 C36.2 C40.2 J5.3 U5.13 U5.36 U5.48
VDD5: C43.2 C44.2 C48.2 J6.3 U6.13 U6.36 U6.48
VDD6: C51.2 C52.2 C56.2 J7.3 U7.13 U7.36 U7.48
VDD7: C59.2 C60.2 C64.2 J8.3 U8.13 U8.36 U8.48
VDD8: C67.2 C68.2 C72.2 J9.3 U9.13 U9.36 U9.48
VDD9: C75.2 C76.2 C80.2 J10.3 U10.13 U10.36 U10.48
VDD10: C83.2 C84.2 C88.2 J11.3 U11.13 U11.36 U11.48
VDD11: C91.2 C92.2 C96.2 J12.3 U12.13 U12.36 U12.48
VDD12: C99.2 C100.2 C104.2 J13.3 U13.13 U13.36 U13.48
VDD13: C107.2 C108.2 C112.2 J14.3 U14.13 U14.36 U14.48
VDD14: C115.2 C116.2 C120.2 J15.3 U15.13 U15.36 U15.48
WP_FLASH: U1.38 U$3.7
WP_FLASH1: U2.38 U$8.7
WP_FLASH2: U3.38 U$12.7
WP_FLASH3: U4.38 U$16.7
WP_FLASH4: U5.38 U$20.7
WP_FLASH5: U6.38 U$24.7
WP_FLASH6: U7.38 U$28.7
WP_FLASH7: U8.38 U$32.7
WP_FLASH8: U9.38 U$36.7
WP_FLASH9: U10.38 U$40.7
WP_FLASH10: U11.38 U$44.7
WP_FLASH11: U12.38 U$48.7
WP_FLASH12: U13.38 U$52.7
WP_FLASH13: U14.38 U$56.7
WP_FLASH14: U15.38 U$60.7
XC1-QFAA: C7.2 U1.34 U$6.1
XC1-QFAA1: C15.2 U2.34 U$4.1
XC1-QFAA2: C23.2 U3.34 U$10.1
XC1-QFAA3: C31.2 U4.34 U$14.1
XC1-QFAA4: C39.2 U5.34 U$18.1
XC1-QFAA5: C47.2 U6.34 U$22.1
XC1-QFAA6: C55.2 U7.34 U$26.1
XC1-QFAA7: C63.2 U8.34 U$30.1
XC1-QFAA8: C71.2 U9.34 U$34.1
XC1-QFAA9: C79.2 U10.34 U$38.1
XC1-QFAA10: C87.2 U11.34 U$42.1
XC1-QFAA11: C95.2 U12.34 U$46.1
XC1-QFAA12: C103.2 U13.34 U$50.1
XC1-QFAA13: C111.2 U14.34 U$54.1
XC1-QFAA14: C119.2 U15.34 U$58.1
XC2-QFAA: C6.2 U1.35 U$6.3
XC2-QFAA1: C14.2 U2.35 U$4.3
XC2-QFAA2: C22.2 U3.35 U$10.3
XC2-QFAA3: C30.2 U4.35 U$14.3
XC2-QFAA4: C38.2 U5.35 U$18.3
XC2-QFAA5: C46.2 U6.35 U$22.3
XC2-QFAA6: C54.2 U7.35 U$26.3
XC2-QFAA7: C62.2 U8.35 U$30.3
XC2-QFAA8: C70.2 U9.35 U$34.3
XC2-QFAA9: C78.2 U10.35 U$38.3
XC2-QFAA10: C86.2 U11.35 U$42.3
XC2-QFAA11: C94.2 U12.35 U$46.3
XC2-QFAA12: C102.2 U13.35 U$50.3
XC2-QFAA13: C110.2 U14.35 U$54.3
XC2-QFAA14: C118.2 U15.35 U$58.3

## Tracks (layer width: path | path; a pad name or v marks a point on that pad's centre or on a via)
ADXL_POWER-QFAA  (via drill 0.25)
  Top 0.152: U1.10 16.05,10.96 16.4,10.61 v16.71,10.61
  Bottom 0.152: C1.2 16.25,14.94 U$1.VDD/IO 16.86,14.72 16.64,14.51 15.88,14.51 15.79,14.42 15.79,13.2 16.4,13.2 | 16.4,13.2 16.54,13.2 U$1.VS | v16.71,10.61 16.71,11.52 16.4,11.83 16.4,13.2
ADXL_POWER-QFAA1  (via drill 0.25)
  Top 0.152: U2.10 40.05,10.96 40.4,10.61 v40.71,10.61
  Bottom 0.152: C8.2 40.25,14.94 U$2.VDD/IO 40.86,14.72 40.64,14.51 39.88,14.51 39.79,14.42 39.79,13.2 40.4,13.2 | 40.4,13.2 40.54,13.2 U$2.VS | v40.71,10.61 40.71,11.52 40.4,11.83 40.4,13.2
ADXL_POWER-QFAA2  (via drill 0.25)
  Top 0.152: U3.10 64.05,10.96 64.4,10.61 v64.71,10.61
  Bottom 0.152: C17.2 64.25,14.94 U$9.VDD/IO 64.86,14.72 64.64,14.51 63.88,14.51 63.79,14.42 63.79,13.2 64.4,13.2 | 64.4,13.2 64.54,13.2 U$9.VS | v64.71,10.61 64.71,11.52 64.4,11.83 64.4,13.2
ADXL_POWER-QFAA3  (via drill 0.25)
  Top 0.152: U4.10 16.05,30.96 16.4,30.61 v16.71,30.61
  Bottom 0.152: C25.2 16.25,34.94 U$13.VDD/IO 16.86,34.73 16.64,34.51 15.88,34.51 15.79,34.42 15.79,33.2 16.4,33.2 | 16.4,33.2 16.54,33.2 U$13.VS | v16.71,30.61 16.71,31.52 16.4,31.83 16.4,33.2
ADXL_POWER-QFAA4  (via drill 0.25)
  Top 0.152: U5.10 40.05,30.96 40.4,30.61 v40.71,30.61
  Bottom 0.152: C33.2 40.25,34.94 U$17.VDD/IO 40.86,34.73 40.64,34.51 39.88,34.51 39.79,34.42 39.79,33.2 40.4,33.2 | 40.4,33.2 40.54,33.2 U$17.VS | v40.71,30.61 40.71,31.52 40.4,31.83 40.4,33.2
ADXL_POWER-QFAA5  (via drill 0.25)
  Top 0.152: U6.10 64.05,30.96 64.4,30.61 v64.71,30.61
  Bottom 0.152: C41.2 64.25,34.94 U$21.VDD/IO 64.86,34.73 64.64,34.51 63.88,34.51 63.79,34.42 63.79,33.2 64.4,33.2 | 64.4,33.2 64.54,33.2 U$21.VS | v64.71,30.61 64.71,31.52 64.4,31.83 64.4,33.2
ADXL_POWER-QFAA6  (via drill 0.25)
  Top 0.152: U7.10 16.05,50.96 16.4,50.61 v16.71,50.61
  Bottom 0.152: C49.2 16.25,54.94 U$25.VDD/IO 16.86,54.73 16.64,54.51 15.88,54.51 15.79,54.42 15.79,53.2 16.4,53.2 | 16.4,53.2 16.54,53.2 U$25.VS | v16.71,50.61 16.71,51.52 16.4,51.83 16.4,53.2
ADXL_POWER-QFAA7  (via drill 0.25)
  Top 0.152: U8.10 40.05,50.96 40.4,50.61 v40.71,50.61
  Bottom 0.152: C57.2 40.25,54.94 U$29.VDD/IO 40.86,54.73 40.64,54.51 39.88,54.51 39.79,54.42 39.79,53.2 40.4,53.2 | 40.4,53.2 40.54,53.2 U$29.VS | v40.71,50.61 40.71,51.52 40.4,51.83 40.4,53.2
ADXL_POWER-QFAA8  (via drill 0.25)
  Top 0.152: U9.10 64.05,50.96 64.4,50.61 v64.71,50.61
  Bottom 0.152: C65.2 64.25,54.94 U$33.VDD/IO 64.86,54.73 64.64,54.51 63.88,54.51 63.79,54.42 63.79,53.2 64.4,53.2 | 64.4,53.2 64.54,53.2 U$33.VS | v64.71,50.61 64.71,51.52 64.4,51.83 64.4,53.2
ADXL_POWER-QFAA9  (via drill 0.25)
  Top 0.152: U10.10 16.05,70.96 16.4,70.61 v16.71,70.61
  Bottom 0.152: C73.2 16.25,74.94 U$37.VDD/IO 16.86,74.72 16.64,74.51 15.88,74.51 15.79,74.42 15.79,73.2 16.4,73.2 | 16.4,73.2 16.54,73.2 U$37.VS | v16.71,70.61 16.71,71.52 16.4,71.83 16.4,73.2
ADXL_POWER-QFAA10  (via drill 0.25)
  Top 0.152: U11.10 40.05,70.96 40.4,70.61 v40.71,70.61
  Bottom 0.152: C81.2 40.25,74.94 U$41.VDD/IO 40.86,74.72 40.64,74.51 39.88,74.51 39.79,74.42 39.79,73.2 40.4,73.2 | 40.4,73.2 40.54,73.2 U$41.VS | v40.71,70.61 40.71,71.52 40.4,71.83 40.4,73.2
ADXL_POWER-QFAA11  (via drill 0.25)
  Top 0.152: U12.10 64.05,70.96 64.4,70.61 v64.71,70.61
  Bottom 0.152: C89.2 64.25,74.94 U$45.VDD/IO 64.86,74.72 64.64,74.51 63.88,74.51 63.79,74.42 63.79,73.2 64.4,73.2 | 64.4,73.2 64.54,73.2 U$45.VS | v64.71,70.61 64.71,71.52 64.4,71.83 64.4,73.2
ADXL_POWER-QFAA12  (via drill 0.25)
  Top 0.152: U13.10 16.05,90.96 16.4,90.61 v16.71,90.61
  Bottom 0.152: C97.2 16.25,94.94 U$49.VDD/IO 16.86,94.72 16.64,94.51 15.88,94.51 15.79,94.42 15.79,93.2 16.4,93.2 | 16.4,93.2 16.54,93.2 U$49.VS | v16.71,90.61 16.71,91.52 16.4,91.83 16.4,93.2
ADXL_POWER-QFAA13  (via drill 0.25)
  Top 0.152: U14.10 40.05,90.96 40.4,90.61 v40.71,90.61
  Bottom 0.152: C105.2 40.25,94.94 U$53.VDD/IO 40.86,94.72 40.64,94.51 39.88,94.51 39.79,94.42 39.79,93.2 40.4,93.2 | 40.4,93.2 40.54,93.2 U$53.VS | v40.71,90.61 40.71,91.52 40.4,91.83 40.4,93.2
ADXL_POWER-QFAA14  (via drill 0.25)
  Top 0.152: U15.10 64.05,90.96 64.4,90.61 v64.71,90.61
  Bottom 0.152: C113.2 64.25,94.94 U$57.VDD/IO 64.86,94.72 64.64,94.51 63.88,94.51 63.79,94.42 63.79,93.2 64.4,93.2 | 64.4,93.2 64.54,93.2 U$57.VS | v64.71,90.61 64.71,91.52 64.4,91.83 64.4,93.2
CS-QFAA  (via drill 0.25 pad 0.46)
  Top 0.152: U1.21 17.59,15.27 19.54,15.27 19.9,14.91 19.9,14.51 19.62,14.23 v19.62,12.57
  Bottom 0.152: v19.62,12.57 19.62,12.67 U$1.CS
CS-QFAA1  (via drill 0.25 pad 0.46)
  Top 0.152: U2.21 41.59,15.27 43.54,15.27 43.9,14.91 43.9,14.51 43.62,14.23 v43.62,12.57
  Bottom 0.152: v43.62,12.57 43.62,12.67 U$2.CS
CS-QFAA2  (via drill 0.25 pad 0.46)
  Top 0.152: U3.21 65.59,15.27 67.54,15.27 67.9,14.91 67.9,14.51 67.62,14.23 v67.62,12.57
  Bottom 0.152: v67.62,12.57 67.62,12.67 U$9.CS
CS-QFAA3  (via drill 0.25 pad 0.46)
  Top 0.152: U4.21 17.59,35.27 19.54,35.27 19.9,34.91 19.9,34.51 19.62,34.23 v19.62,32.58
  Bottom 0.152: v19.62,32.58 19.62,32.67 U$13.CS
CS-QFAA4  (via drill 0.25 pad 0.46)
  Top 0.152: U5.21 41.59,35.27 43.54,35.27 43.9,34.91 43.9,34.51 43.62,34.23 v43.62,32.58
  Bottom 0.152: v43.62,32.58 43.62,32.67 U$17.CS
CS-QFAA5  (via drill 0.25 pad 0.46)
  Top 0.152: U6.21 65.59,35.27 67.54,35.27 67.9,34.91 67.9,34.51 67.62,34.23 v67.62,32.58
  Bottom 0.152: v67.62,32.58 67.62,32.67 U$21.CS
CS-QFAA6  (via drill 0.25 pad 0.46)
  Top 0.152: U7.21 17.59,55.27 19.54,55.27 19.9,54.91 19.9,54.51 19.62,54.23 v19.62,52.58
  Bottom 0.152: v19.62,52.58 19.62,52.67 U$25.CS
CS-QFAA7  (via drill 0.25 pad 0.46)
  Top 0.152: U8.21 41.59,55.27 43.54,55.27 43.9,54.91 43.9,54.51 43.62,54.23 v43.62,52.58
  Bottom 0.152: v43.62,52.58 43.62,52.67 U$29.CS
CS-QFAA8  (via drill 0.25 pad 0.46)
  Top 0.152: U9.21 65.59,55.27 67.54,55.27 67.9,54.91 67.9,54.51 67.62,54.23 v67.62,52.58
  Bottom 0.152: v67.62,52.58 67.62,52.67 U$33.CS
CS-QFAA9  (via drill 0.25 pad 0.46)
  Top 0.152: U10.21 17.59,75.27 19.54,75.27 19.9,74.91 19.9,74.51 19.62,74.23 v19.62,72.58
  Bottom 0.152: v19.62,72.58 19.62,72.67 U$37.CS
CS-QFAA10  (via drill 0.25 pad 0.46)
  Top 0.152: U11.21 41.59,75.27 43.54,75.27 43.9,74.91 43.9,74.51 43.62,74.23 v43.62,72.58
  Bottom 0.152: v43.62,72.58 43.62,72.67 U$41.CS
CS-QFAA11  (via drill 0.25 pad 0.46)
  Top 0.152: U12.21 65.59,75.27 67.54,75.27 67.9,74.91 67.9,74.51 67.62,74.23 v67.62,72.58
  Bottom 0.152: v67.62,72.58 67.62,72.67 U$45.CS
CS-QFAA12  (via drill 0.25 pad 0.46)
  Top 0.152: U13.21 17.59,95.27 19.54,95.27 19.9,94.91 19.9,94.51 19.62,94.23 v19.62,92.58
  Bottom 0.152: v19.62,92.58 19.62,92.67 U$49.CS
CS-QFAA13  (via drill 0.25 pad 0.46)
  Top 0.152: U14.21 41.59,95.27 43.54,95.27 43.9,94.91 43.9,94.51 43.62,94.23 v43.62,92.58
  Bottom 0.152: v43.62,92.58 43.62,92.67 U$53.CS
CS-QFAA14  (via drill 0.25 pad 0.46)
  Top 0.152: U15.21 65.59,95.27 67.54,95.27 67.9,94.91 67.9,94.51 67.62,94.23 v67.62,92.58
  Bottom 0.152: v67.62,92.58 67.62,92.67 U$57.CS
CS_FLASH  (via drill 0.25)
  Top 0.152: U$3.5 17.76,18.88 v17.79,18.91 | v18.3,16.28 18.17,16.15 U1.23
  Bottom 0.152: v17.79,18.91 17.79,16.79 v18.3,16.28
CS_FLASH1  (via drill 0.25)
  Top 0.152: U$8.5 41.76,18.88 v41.79,18.91 | v42.3,16.28 42.17,16.15 U2.23
  Bottom 0.152: v41.79,18.91 41.79,16.79 v42.3,16.28
CS_FLASH2  (via drill 0.25)
  Top 0.152: U$12.5 65.76,18.88 v65.79,18.91 | v66.3,16.28 66.17,16.15 U3.23
  Bottom 0.152: v65.79,18.91 65.79,16.79 v66.3,16.28
CS_FLASH3  (via drill 0.25)
  Top 0.152: U$16.5 17.76,38.88 v17.79,38.91 | v18.3,36.28 18.17,36.15 U4.23
  Bottom 0.152: v17.79,38.91 17.79,36.79 v18.3,36.28
CS_FLASH4  (via drill 0.25)
  Top 0.152: U$20.5 41.76,38.88 v41.79,38.91 | v42.3,36.28 42.17,36.15 U5.23
  Bottom 0.152: v41.79,38.91 41.79,36.79 v42.3,36.28
CS_FLASH5  (via drill 0.25)
  Top 0.152: U$24.5 65.76,38.88 v65.79,38.91 | v66.3,36.28 66.17,36.15 U6.23
  Bottom 0.152: v65.79,38.91 65.79,36.79 v66.3,36.28
CS_FLASH6  (via drill 0.25)
  Top 0.152: U$28.5 17.76,58.88 v17.79,58.91 | v18.3,56.28 18.17,56.15 U7.23
  Bottom 0.152: v17.79,58.91 17.79,56.79 v18.3,56.28
CS_FLASH7  (via drill 0.25)
  Top 0.152: U$32.5 41.76,58.88 v41.79,58.91 | v42.3,56.28 42.17,56.15 U8.23
  Bottom 0.152: v41.79,58.91 41.79,56.79 v42.3,56.28
CS_FLASH8  (via drill 0.25)
  Top 0.152: U$36.5 65.76,58.88 v65.79,58.91 | v66.3,56.28 66.17,56.15 U9.23
  Bottom 0.152: v65.79,58.91 65.79,56.79 v66.3,56.28
CS_FLASH9  (via drill 0.25)
  Top 0.152: U$40.5 17.76,78.88 v17.79,78.91 | v18.3,76.28 18.17,76.15 U10.23
  Bottom 0.152: v17.79,78.91 17.79,76.79 v18.3,76.28
CS_FLASH10  (via drill 0.25)
  Top 0.152: U$44.5 41.76,78.88 v41.79,78.91 | v42.3,76.28 42.17,76.15 U11.23
  Bottom 0.152: v41.79,78.91 41.79,76.79 v42.3,76.28
CS_FLASH11  (via drill 0.25)
  Top 0.152: U$48.5 65.76,78.88 v65.79,78.91 | v66.3,76.28 66.17,76.15 U12.23
  Bottom 0.152: v65.79,78.91 65.79,76.79 v66.3,76.28
CS_FLASH12  (via drill 0.25)
  Top 0.152: U$52.5 17.76,98.88 v17.79,98.91 | v18.3,96.28 18.17,96.15 U13.23
  Bottom 0.152: v17.79,98.91 17.79,96.79 v18.3,96.28
CS_FLASH13  (via drill 0.25)
  Top 0.152: U$56.5 41.76,98.88 v41.79,98.91 | v42.3,96.28 42.17,96.15 U14.23
  Bottom 0.152: v41.79,98.91 41.79,96.79 v42.3,96.28
CS_FLASH14  (via drill 0.25)
  Top 0.152: U$60.5 65.76,98.88 v65.79,98.91 | v66.3,96.28 66.17,96.15 U15.23
  Bottom 0.152: v65.79,98.91 65.79,96.79 v66.3,96.28
DEC1-QFAA
  Top 0.152: C2.1 12.45,10.91 U1.1
DEC1-QFAA1
  Top 0.152: C10.1 36.45,10.91 U2.1
DEC1-QFAA2
  Top 0.152: C18.1 60.45,10.91 U3.1
DEC1-QFAA3
  Top 0.152: C26.1 12.45,30.91 U4.1
DEC1-QFAA4
  Top 0.152: C34.1 36.45,30.91 U5.1
DEC1-QFAA5
  Top 0.152: C42.1 60.45,30.91 U6.1
DEC1-QFAA6
  Top 0.152: C50.1 12.45,50.91 U7.1
DEC1-QFAA7
  Top 0.152: C58.1 36.45,50.91 U8.1
DEC1-QFAA8
  Top 0.152: C66.1 60.45,50.91 U9.1
DEC1-QFAA9
  Top 0.152: C74.1 12.45,70.91 U10.1
DEC1-QFAA10
  Top 0.152: C82.1 36.45,70.91 U11.1
DEC1-QFAA11
  Top 0.152: C90.1 60.45,70.91 U12.1
DEC1-QFAA12
  Top 0.152: C98.1 12.45,90.91 U13.1
DEC1-QFAA13
  Top 0.152: C106.1 36.45,90.91 U14.1
DEC1-QFAA14
  Top 0.152: C114.1 60.45,90.91 U15.1
DEC3-QFAA
  Top 0.152: U1.33 13.65,17.87 C5.1
DEC3-QFAA1
  Top 0.152: U2.33 37.65,17.87 C13.1
DEC3-QFAA2
  Top 0.152: U3.33 61.65,17.87 C21.1
DEC3-QFAA3
  Top 0.152: U4.33 13.65,37.87 C29.1
DEC3-QFAA4
  Top 0.152: U5.33 37.65,37.87 C37.1
DEC3-QFAA5
  Top 0.152: U6.33 61.65,37.87 C45.1
DEC3-QFAA6
  Top 0.152: U7.33 13.65,57.87 C53.1
DEC3-QFAA7
  Top 0.152: U8.33 37.65,57.87 C61.1
DEC3-QFAA8
  Top 0.152: U9.33 61.65,57.87 C69.1
DEC3-QFAA9
  Top 0.152: U10.33 13.65,77.87 C77.1
DEC3-QFAA10
  Top 0.152: U11.33 37.65,77.87 C85.1
DEC3-QFAA11
  Top 0.152: U12.33 61.65,77.87 C93.1
DEC3-QFAA12
  Top 0.152: U13.33 13.65,97.87 C101.1
DEC3-QFAA13
  Top 0.152: U14.33 37.65,97.87 C109.1
DEC3-QFAA14
  Top 0.152: U15.33 61.65,97.87 C117.1
DEC4-QFAA
  Top 0.152: U$7.P$4 11.64,13.03 11.65,13.02 11.72,13.02 U1.46
DEC4-QFAA1
  Top 0.152: U$5.P$4 35.64,13.03 35.65,13.02 35.72,13.02 U2.46
DEC4-QFAA2
  Top 0.152: U$11.P$4 59.64,13.03 59.65,13.02 59.72,13.02 U3.46
DEC4-QFAA3
  Top 0.152: U$15.P$4 11.64,33.03 11.65,33.02 11.72,33.02 U4.46
DEC4-QFAA4
  Top 0.152: U$19.P$4 35.64,33.03 35.65,33.02 35.72,33.02 U5.46
DEC4-QFAA5
  Top 0.152: U$23.P$4 59.64,33.03 59.65,33.02 59.72,33.02 U6.46
DEC4-QFAA6
  Top 0.152: U$27.P$4 11.64,53.03 11.65,53.02 11.72,53.02 U7.46
DEC4-QFAA7
  Top 0.152: U$31.P$4 35.64,53.03 35.65,53.02 35.72,53.02 U8.46
DEC4-QFAA8
  Top 0.152: U$35.P$4 59.64,53.03 59.65,53.02 59.72,53.02 U9.46
DEC4-QFAA9
  Top 0.152: U$39.P$4 11.64,73.03 11.65,73.02 11.72,73.02 U10.46
DEC4-QFAA10
  Top 0.152: U$43.P$4 35.64,73.03 35.65,73.02 35.72,73.02 U11.46
DEC4-QFAA11
  Top 0.152: U$47.P$4 59.64,73.03 59.65,73.02 59.72,73.02 U12.46
DEC4-QFAA12
  Top 0.152: U$51.P$4 11.64,93.03 11.65,93.02 11.72,93.02 U13.46
DEC4-QFAA13
  Top 0.152: U$55.P$4 35.64,93.03 35.65,93.02 35.72,93.02 U14.46
DEC4-QFAA14
  Top 0.152: U$59.P$4 59.64,93.03 59.65,93.02 59.72,93.02 U15.46
FLASH_POWER  (via drill 0.25)
  Top 0.152: U$3.1 18.16,18.38 v18.32,18.22 | v19.03,16.09 18.69,15.75 U1.22
  Bottom 0.152: v18.32,18.22 19.03,17.51 v19.03,16.09
FLASH_POWER1  (via drill 0.25)
  Top 0.152: U$8.1 42.16,18.38 v42.33,18.22 | v43.03,16.09 42.69,15.75 U2.22
  Bottom 0.152: v42.33,18.22 43.03,17.51 v43.03,16.09
FLASH_POWER2  (via drill 0.25)
  Top 0.152: U$12.1 66.16,18.38 v66.33,18.22 | v67.03,16.09 66.69,15.75 U3.22
  Bottom 0.152: v66.33,18.22 67.03,17.51 v67.03,16.09
FLASH_POWER3  (via drill 0.25)
  Top 0.152: U$16.1 18.16,38.38 v18.32,38.22 | v19.03,36.09 18.69,35.75 U4.22
  Bottom 0.152: v18.32,38.22 19.03,37.51 v19.03,36.09
FLASH_POWER4  (via drill 0.25)
  Top 0.152: U$20.1 42.16,38.38 v42.33,38.22 | v43.03,36.09 42.69,35.75 U5.22
  Bottom 0.152: v42.33,38.22 43.03,37.51 v43.03,36.09
FLASH_POWER5  (via drill 0.25)
  Top 0.152: U$24.1 66.16,38.38 v66.33,38.22 | v67.03,36.09 66.69,35.75 U6.22
  Bottom 0.152: v66.33,38.22 67.03,37.51 v67.03,36.09
FLASH_POWER6  (via drill 0.25)
  Top 0.152: U$28.1 18.16,58.38 v18.32,58.22 | v19.03,56.09 18.69,55.75 U7.22
  Bottom 0.152: v18.32,58.22 19.03,57.51 v19.03,56.09
FLASH_POWER7  (via drill 0.25)
  Top 0.152: U$32.1 42.16,58.38 v42.33,58.22 | v43.03,56.09 42.69,55.75 U8.22
  Bottom 0.152: v42.33,58.22 43.03,57.51 v43.03,56.09
FLASH_POWER8  (via drill 0.25)
  Top 0.152: U$36.1 66.16,58.38 v66.33,58.22 | v67.03,56.09 66.69,55.75 U9.22
  Bottom 0.152: v66.33,58.22 67.03,57.51 v67.03,56.09
FLASH_POWER9  (via drill 0.25)
  Top 0.152: U$40.1 18.16,78.38 v18.32,78.22 | v19.03,76.09 18.69,75.75 U10.22
  Bottom 0.152: v18.32,78.22 19.03,77.51 v19.03,76.09
FLASH_POWER10  (via drill 0.25)
  Top 0.152: U$44.1 42.16,78.38 v42.33,78.22 | v43.03,76.09 42.69,75.75 U11.22
  Bottom 0.152: v42.33,78.22 43.03,77.51 v43.03,76.09
FLASH_POWER11  (via drill 0.25)
  Top 0.152: U$48.1 66.16,78.38 v66.33,78.22 | v67.03,76.09 66.69,75.75 U12.22
  Bottom 0.152: v66.33,78.22 67.03,77.51 v67.03,76.09
FLASH_POWER12  (via drill 0.25)
  Top 0.152: U$52.1 18.16,98.38 v18.32,98.22 | v19.03,96.09 18.69,95.75 U13.22
  Bottom 0.152: v18.32,98.22 19.03,97.51 v19.03,96.09
FLASH_POWER13  (via drill 0.25)
  Top 0.152: U$56.1 42.16,98.38 v42.33,98.22 | v43.03,96.09 42.69,95.75 U14.22
  Bottom 0.152: v42.33,98.22 43.03,97.51 v43.03,96.09
FLASH_POWER14  (via drill 0.25)
  Top 0.152: U$60.1 66.16,98.38 v66.33,98.22 | v67.03,96.09 66.69,95.75 U15.22
  Bottom 0.152: v66.33,98.22 67.03,97.51 v67.03,96.09
GND  (via drill 0.25, 0.25 pad 0.46, 0.25 pad 0.51, 0.5, 0.5 pad 0.46)
  Top 0.152: v19.52,11.65 19.76,11.9 21.2,11.9 23.46,14.16 J2.4 | 14.41,14.12 14.45,14.15 14.45,14.55 U1.EP v14.4,14.1 | v14.4,14.1 12.89,12.59 v12.74,12.59 | v13.5,12.59 v14.27,12.59 | C3.1 13.84,10.48 v13.95,10.37 | C4.1 12.74,10.76 12.74,10.67 12.58,10.51 v12.58,10.35 | C2.2 11.96,10.4 v11.91,10.35 | C5.2 14.17,17.96 v14.75,17.96 | C7.1 14.74,18.74 v14.8,18.69 | U$3.8 15.01,19.45 v14.89,19.45 | C6.1 10.59,16.05 v10.46,15.92 | 14.45,16.5 14.4,16.45 v14.4,14.1 | U$7.P$3 10.41,13.11 v10.41,13.67 | C9.1 10.41,10.41 v10.4,10.4
  Top 0.254: U1.31 14.45,16.5 14.45,14.55 | U1.45 13.65,13.35 v14.4,14.1 14.41,14.12 U1.EP
  Top 0.305: U1.EP 14.65,12.95 v15,12.6 | v15.7,12.6 15.31,12.99 v15.31,13.3
  Bottom 0.152: C1.1 16,15.65 v16,16 | U$1.GND@2 U$1.GND@1 | U$1.GND@1 17.36,11.04 v17.68,10.72 | v12.74,12.59 v13.5,12.59 | U$1.GND@1 17.36,13.92 17.12,14.16 U$1.GND@3
  Bottom 0.305: J2.4 21.55,18.25 v19.4,18.25 | v15,12.6 v15.7,12.6 | v15.31,13.3 v15.3,13.31 v15.3,14.2
  pour Route10: 10,20 10,10 20,10 20,20
GND1  (via drill 0.25, 0.25 pad 0.46, 0.25 pad 0.51, 0.5, 0.5 pad 0.46)
  Top 0.152: v43.52,11.65 43.76,11.9 45.2,11.9 47.46,14.16 J1.4 | 38.41,14.12 38.45,14.15 38.45,14.55 U2.EP v38.4,14.1 | v38.4,14.1 36.89,12.59 v36.74,12.59 | v37.5,12.59 v38.27,12.59 | C11.1 37.84,10.48 v37.95,10.37 | C12.1 36.74,10.76 36.74,10.67 36.58,10.51 v36.58,10.35 | C10.2 35.96,10.4 v35.91,10.35 | C13.2 38.17,17.96 v38.75,17.96 | C15.1 38.74,18.74 v38.8,18.69 | U$8.8 39.01,19.45 v38.89,19.45 | C14.1 34.59,16.05 v34.45,15.92 | 38.45,16.5 38.4,16.45 v38.4,14.1 | U$5.P$3 34.41,13.11 v34.41,13.67 | C16.1 34.41,10.41 v34.4,10.4
  Top 0.254: U2.31 38.45,16.5 38.45,14.55 | U2.45 37.65,13.35 v38.4,14.1 38.41,14.12 U2.EP
  Top 0.305: U2.EP 38.65,12.95 v39,12.6 | v39.7,12.6 39.31,12.99 v39.31,13.3
  Bottom 0.152: C8.1 40,15.65 v40,16 | U$2.GND@2 U$2.GND@1 | U$2.GND@1 41.36,11.04 v41.68,10.72 | v36.74,12.59 v37.5,12.59 | U$2.GND@1 41.36,13.92 41.12,14.16 U$2.GND@3
  Bottom 0.305: J1.4 45.55,18.25 v43.4,18.25 | v39,12.6 v39.7,12.6 | v39.31,13.3 v39.3,13.31 v39.3,14.2
  pour Route10: 34,20 34,10 44,10 44,20
GND2  (via drill 0.25, 0.25 pad 0.46, 0.25 pad 0.51, 0.5, 0.5 pad 0.46)
  Top 0.152: v67.52,11.65 67.76,11.9 69.19,11.9 71.46,14.16 J3.4 | 62.41,14.12 62.45,14.15 62.45,14.55 U3.EP v62.4,14.1 | v62.4,14.1 60.89,12.59 v60.74,12.59 | v61.51,12.59 v62.27,12.59 | C19.1 61.84,10.48 v61.95,10.37 | C20.1 60.74,10.76 60.74,10.67 60.58,10.51 v60.58,10.35 | C18.2 59.96,10.4 v59.91,10.35 | C21.2 62.17,17.96 v62.75,17.96 | C23.1 62.74,18.74 v62.8,18.69 | U$12.8 63.01,19.45 v62.89,19.45 | C22.1 58.59,16.05 v58.45,15.92 | 62.45,16.5 62.4,16.45 v62.4,14.1 | U$11.P$3 58.41,13.11 v58.41,13.67 | C24.1 58.41,10.41 v58.4,10.4
  Top 0.254: U3.31 62.45,16.5 62.45,14.55 | U3.45 61.65,13.35 v62.4,14.1 62.41,14.12 U3.EP
  Top 0.305: U3.EP 62.65,12.95 v63,12.6 | v63.7,12.6 63.31,12.99 v63.31,13.3
  Bottom 0.152: C17.1 64,15.65 v64,16 | U$9.GND@2 U$9.GND@1 | U$9.GND@1 65.36,11.04 v65.68,10.72 | v60.74,12.59 v61.51,12.59 | U$9.GND@1 65.36,13.92 65.12,14.16 U$9.GND@3
  Bottom 0.305: J3.4 69.55,18.25 v67.4,18.25 | v63,12.6 v63.7,12.6 | v63.31,13.3 v63.3,13.31 v63.3,14.2
  pour Route10: 58,20 58,10 68,10 68,20
GND3  (via drill 0.25, 0.25 pad 0.46, 0.25 pad 0.51, 0.5, 0.5 pad 0.46)
  Top 0.152: v19.52,31.65 19.76,31.9 21.2,31.9 23.46,34.16 J4.4 | 14.41,34.12 14.45,34.15 14.45,34.55 U4.EP v14.4,34.1 | v14.4,34.1 12.89,32.59 v12.74,32.59 | v13.5,32.59 v14.27,32.59 | C27.1 13.84,30.48 v13.95,30.37 | C28.1 12.74,30.76 12.74,30.67 12.58,30.51 v12.58,30.35 | C26.2 11.96,30.4 v11.91,30.35 | C29.2 14.17,37.96 v14.75,37.96 | C31.1 14.74,38.74 v14.8,38.69 | U$16.8 15.01,39.45 v14.89,39.45 | C30.1 10.59,36.05 v10.46,35.92 | 14.45,36.5 14.4,36.45 v14.4,34.1 | U$15.P$3 10.41,33.11 v10.41,33.67 | C32.1 10.41,30.41 v10.4,30.4
  Top 0.254: U4.31 14.45,36.5 14.45,34.55 | U4.45 13.65,33.35 v14.4,34.1 14.41,34.12 U4.EP
  Top 0.305: U4.EP 14.65,32.95 v15,32.6 | v15.7,32.6 15.31,32.99 v15.31,33.3
  Bottom 0.152: C25.1 16,35.65 v16,36 | U$13.GND@2 U$13.GND@1 | U$13.GND@1 17.36,31.04 v17.68,30.72 | v12.74,32.59 v13.5,32.59 | U$13.GND@1 17.36,33.92 17.12,34.16 U$13.GND@3
  Bottom 0.305: J4.4 21.55,38.25 v19.4,38.25 | v15,32.6 v15.7,32.6 | v15.31,33.3 v15.3,33.31 v15.3,34.2
  pour Route10: 10,40 10,30 20,30 20,40
GND4  (via drill 0.25, 0.25 pad 0.46, 0.25 pad 0.51, 0.5, 0.5 pad 0.46)
  Top 0.152: v43.52,31.65 43.76,31.9 45.2,31.9 47.46,34.16 J5.4 | 38.41,34.12 38.45,34.15 38.45,34.55 U5.EP v38.4,34.1 | v38.4,34.1 36.89,32.59 v36.74,32.59 | v37.5,32.59 v38.27,32.59 | C35.1 37.84,30.48 v37.95,30.37 | C36.1 36.74,30.76 36.74,30.67 36.58,30.51 v36.58,30.35 | C34.2 35.96,30.4 v35.91,30.35 | C37.2 38.17,37.96 v38.75,37.96 | C39.1 38.74,38.74 v38.8,38.69 | U$20.8 39.01,39.45 v38.89,39.45 | C38.1 34.59,36.05 v34.45,35.92 | 38.45,36.5 38.4,36.45 v38.4,34.1 | U$19.P$3 34.41,33.11 v34.41,33.67 | C40.1 34.41,30.41 v34.4,30.4
  Top 0.254: U5.31 38.45,36.5 38.45,34.55 | U5.45 37.65,33.35 v38.4,34.1 38.41,34.12 U5.EP
  Top 0.305: U5.EP 38.65,32.95 v39,32.6 | v39.7,32.6 39.31,32.99 v39.31,33.3
  Bottom 0.152: C33.1 40,35.65 v40,36 | U$17.GND@2 U$17.GND@1 | U$17.GND@1 41.36,31.04 v41.68,30.72 | v36.74,32.59 v37.5,32.59 | U$17.GND@1 41.36,33.92 41.12,34.16 U$17.GND@3
  Bottom 0.305: J5.4 45.55,38.25 v43.4,38.25 | v39,32.6 v39.7,32.6 | v39.31,33.3 v39.3,33.31 v39.3,34.2
  pour Route10: 34,40 34,30 44,30 44,40
GND5  (via drill 0.25, 0.25 pad 0.46, 0.25 pad 0.51, 0.5, 0.5 pad 0.46)
  Top 0.152: v67.52,31.65 67.76,31.9 69.19,31.9 71.46,34.16 J6.4 | 62.41,34.12 62.45,34.15 62.45,34.55 U6.EP v62.4,34.1 | v62.4,34.1 60.89,32.59 v60.74,32.59 | v61.51,32.59 v62.27,32.59 | C43.1 61.84,30.48 v61.95,30.37 | C44.1 60.74,30.76 60.74,30.67 60.58,30.51 v60.58,30.35 | C42.2 59.96,30.4 v59.91,30.35 | C45.2 62.17,37.96 v62.75,37.96 | C47.1 62.74,38.74 v62.8,38.69 | U$24.8 63.01,39.45 v62.89,39.45 | C46.1 58.59,36.05 v58.45,35.92 | 62.45,36.5 62.4,36.45 v62.4,34.1 | U$23.P$3 58.41,33.11 v58.41,33.67 | C48.1 58.41,30.41 v58.4,30.4
  Top 0.254: U6.31 62.45,36.5 62.45,34.55 | U6.45 61.65,33.35 v62.4,34.1 62.41,34.12 U6.EP
  Top 0.305: U6.EP 62.65,32.95 v63,32.6 | v63.7,32.6 63.31,32.99 v63.31,33.3
  Bottom 0.152: C41.1 64,35.65 v64,36 | U$21.GND@2 U$21.GND@1 | U$21.GND@1 65.36,31.04 v65.68,30.72 | v60.74,32.59 v61.51,32.59 | U$21.GND@1 65.36,33.92 65.12,34.16 U$21.GND@3